# Altium PCB BV100011_UniversalSlave.PcbDoc (part 1 of 2)
Units mil, origin at the board's own origin, x right, y up, seen from the top; angles counter-clockwise.
Board outline 6690 x 4040 mil, 4 copper layers (Top Layer, Layer 1, Layer 2, Bottom Layer), stack 26.156 mil thick; 242 components, 211 nets, 882 pads, 216 vias.
Unrouted connection lines stored in the file: 81.
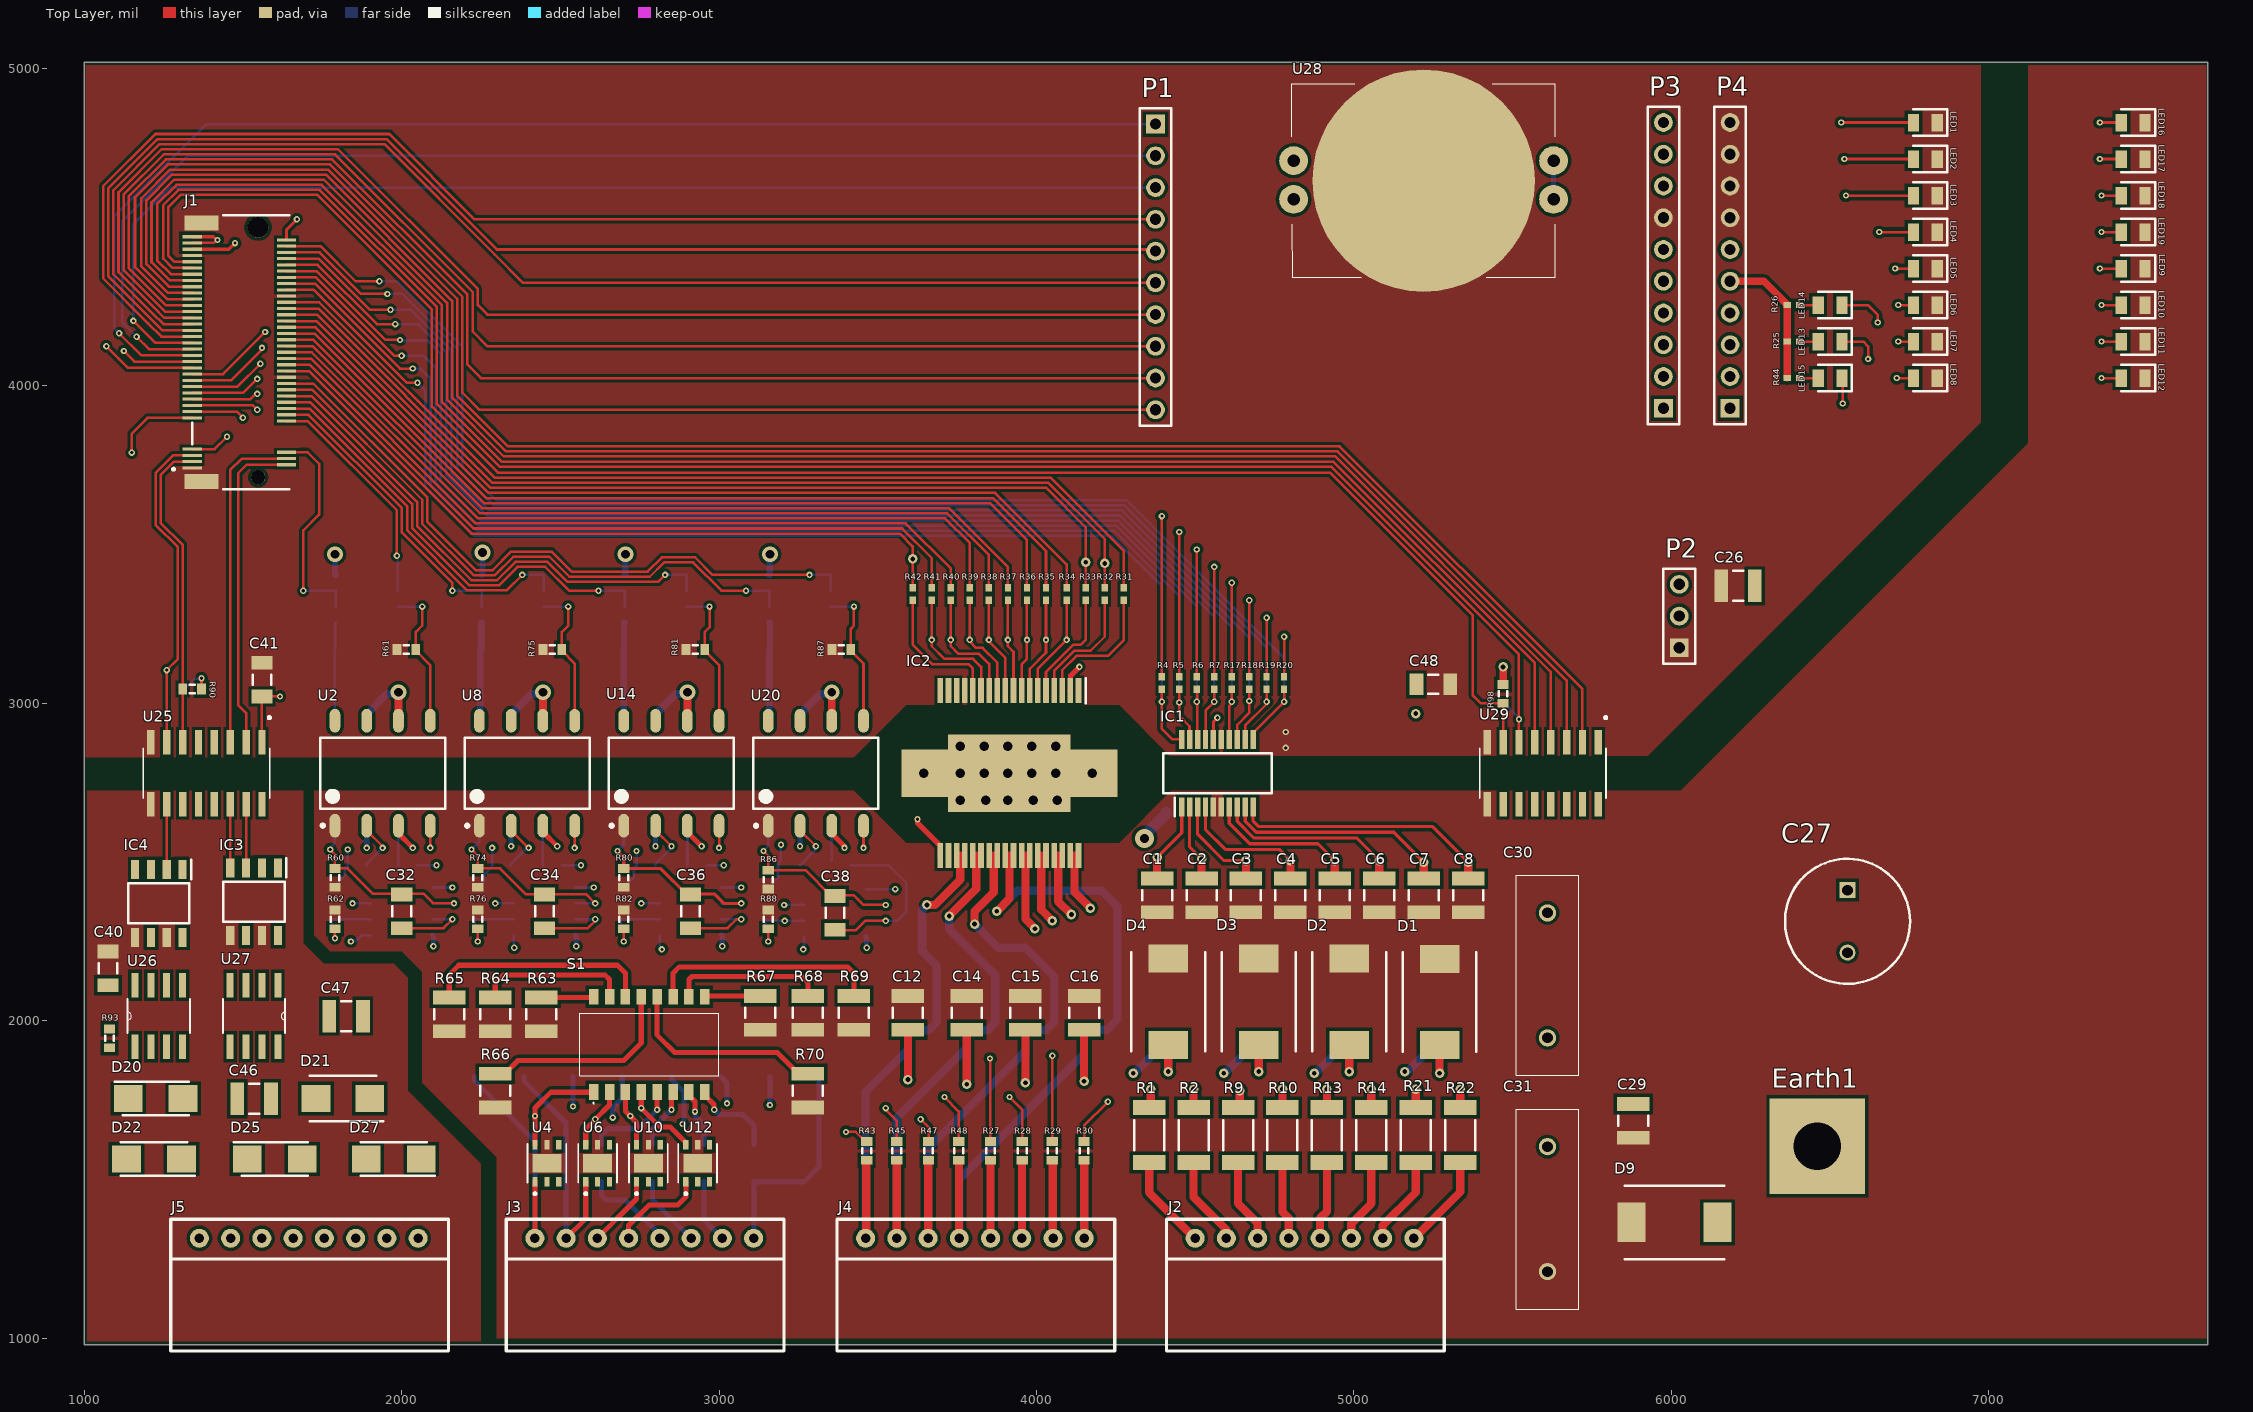
[diagram p0: Top Layer view]
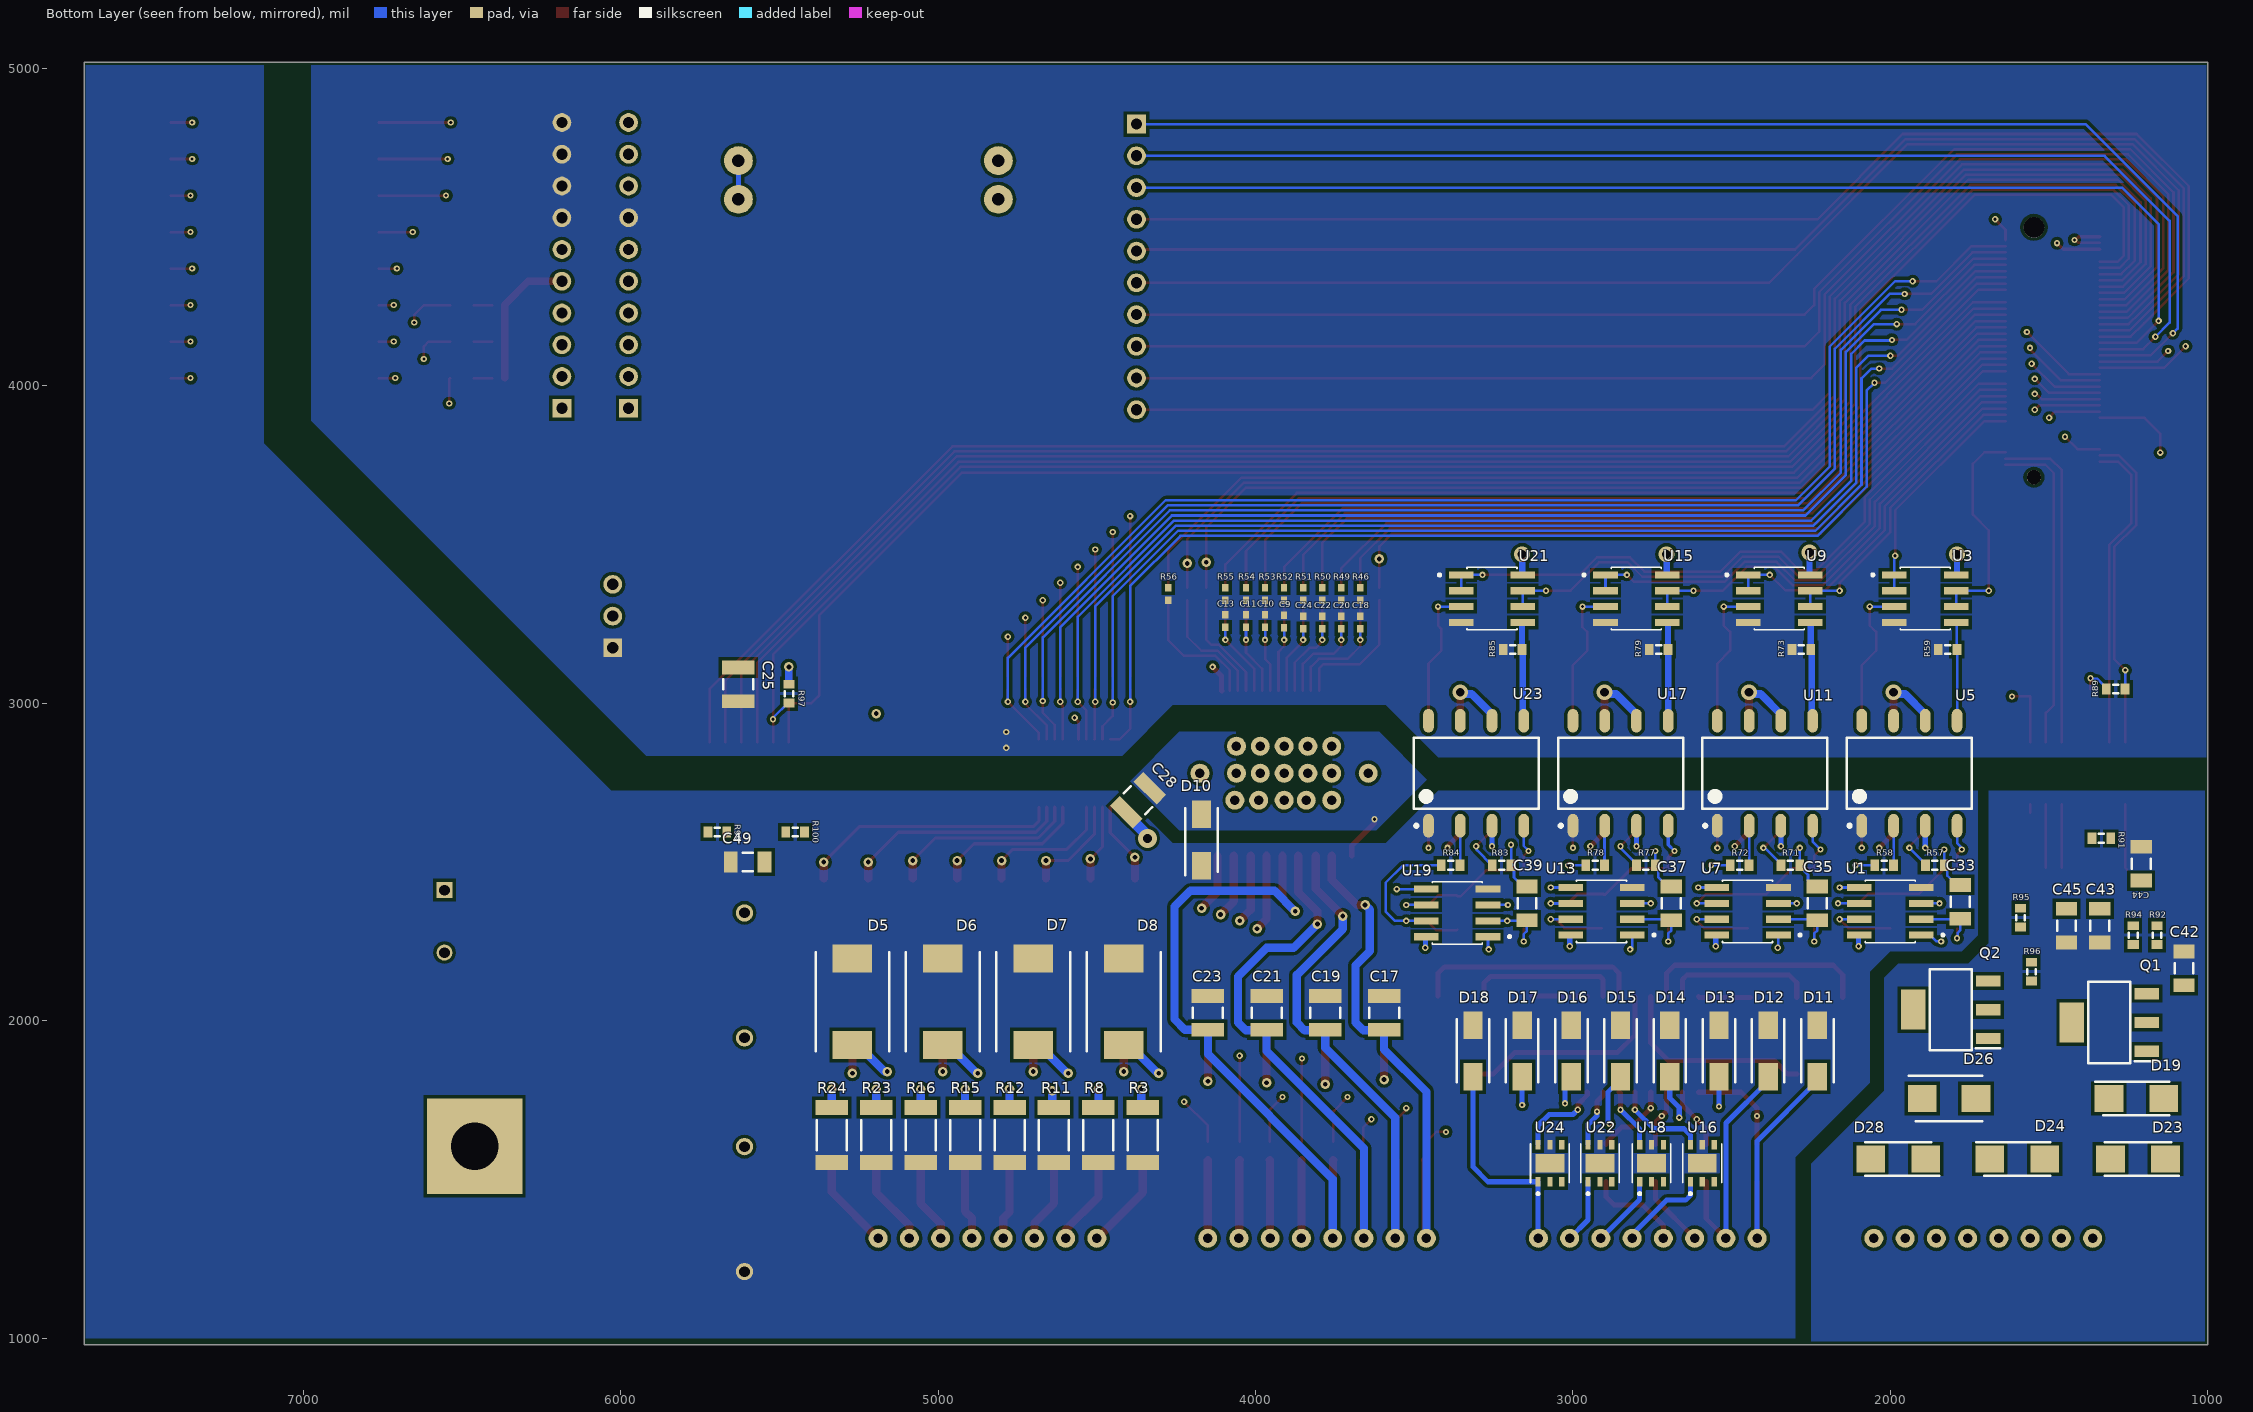
[diagram p1: Bottom Layer view, seen from below]
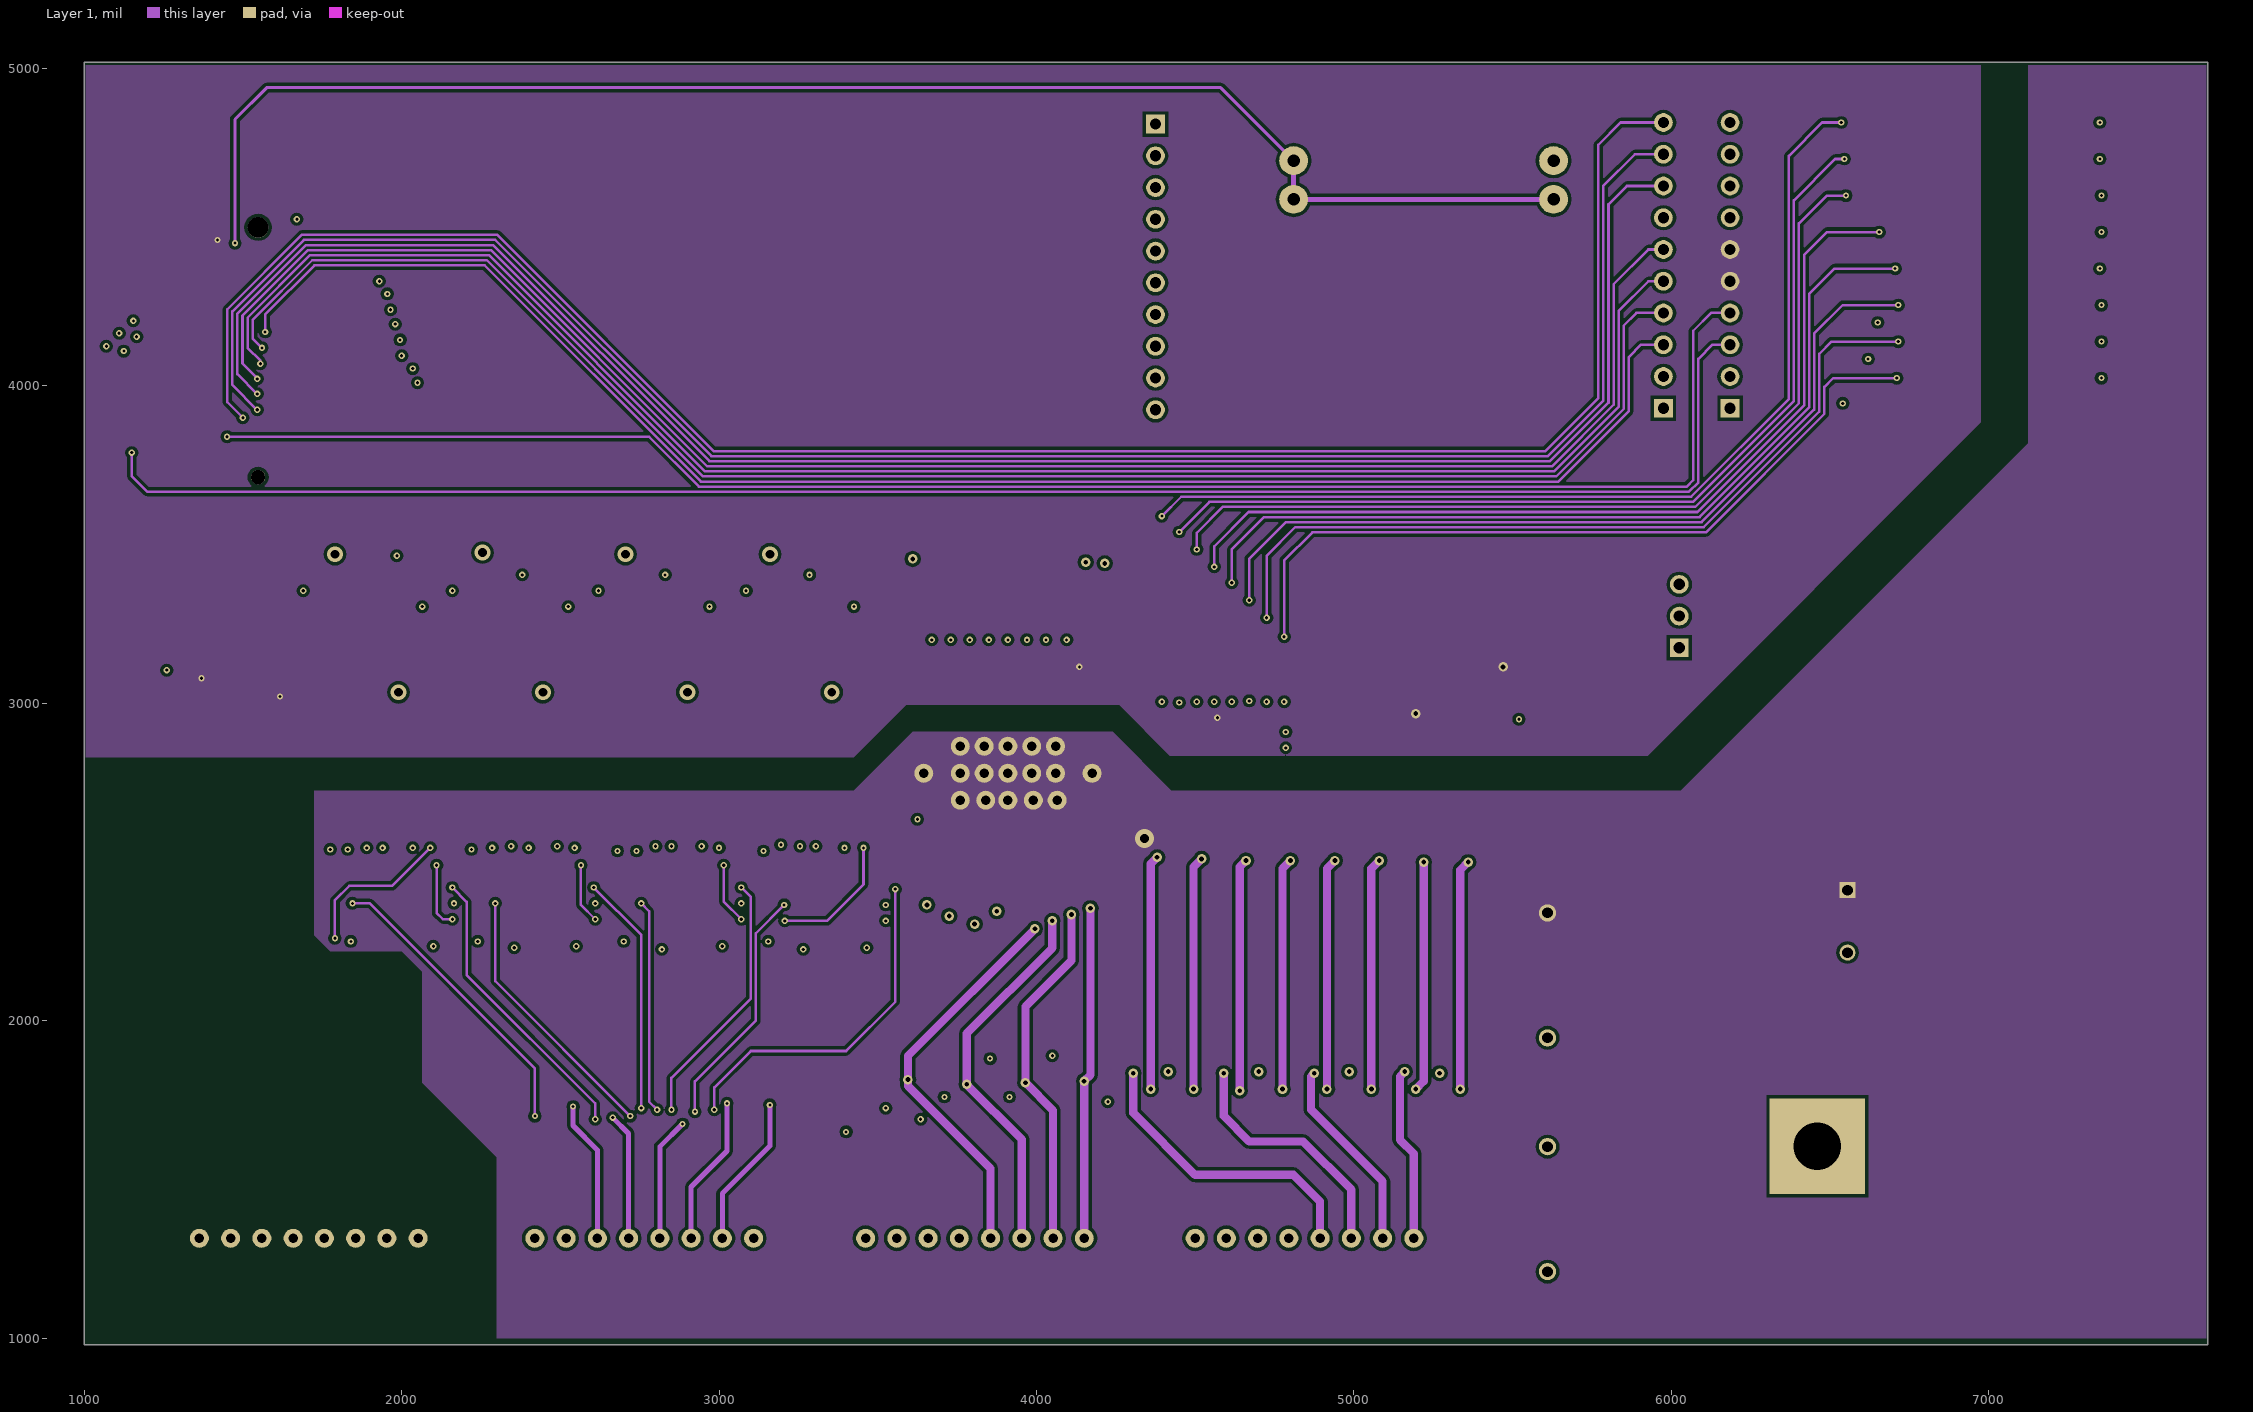
[diagram p2: Layer 1]
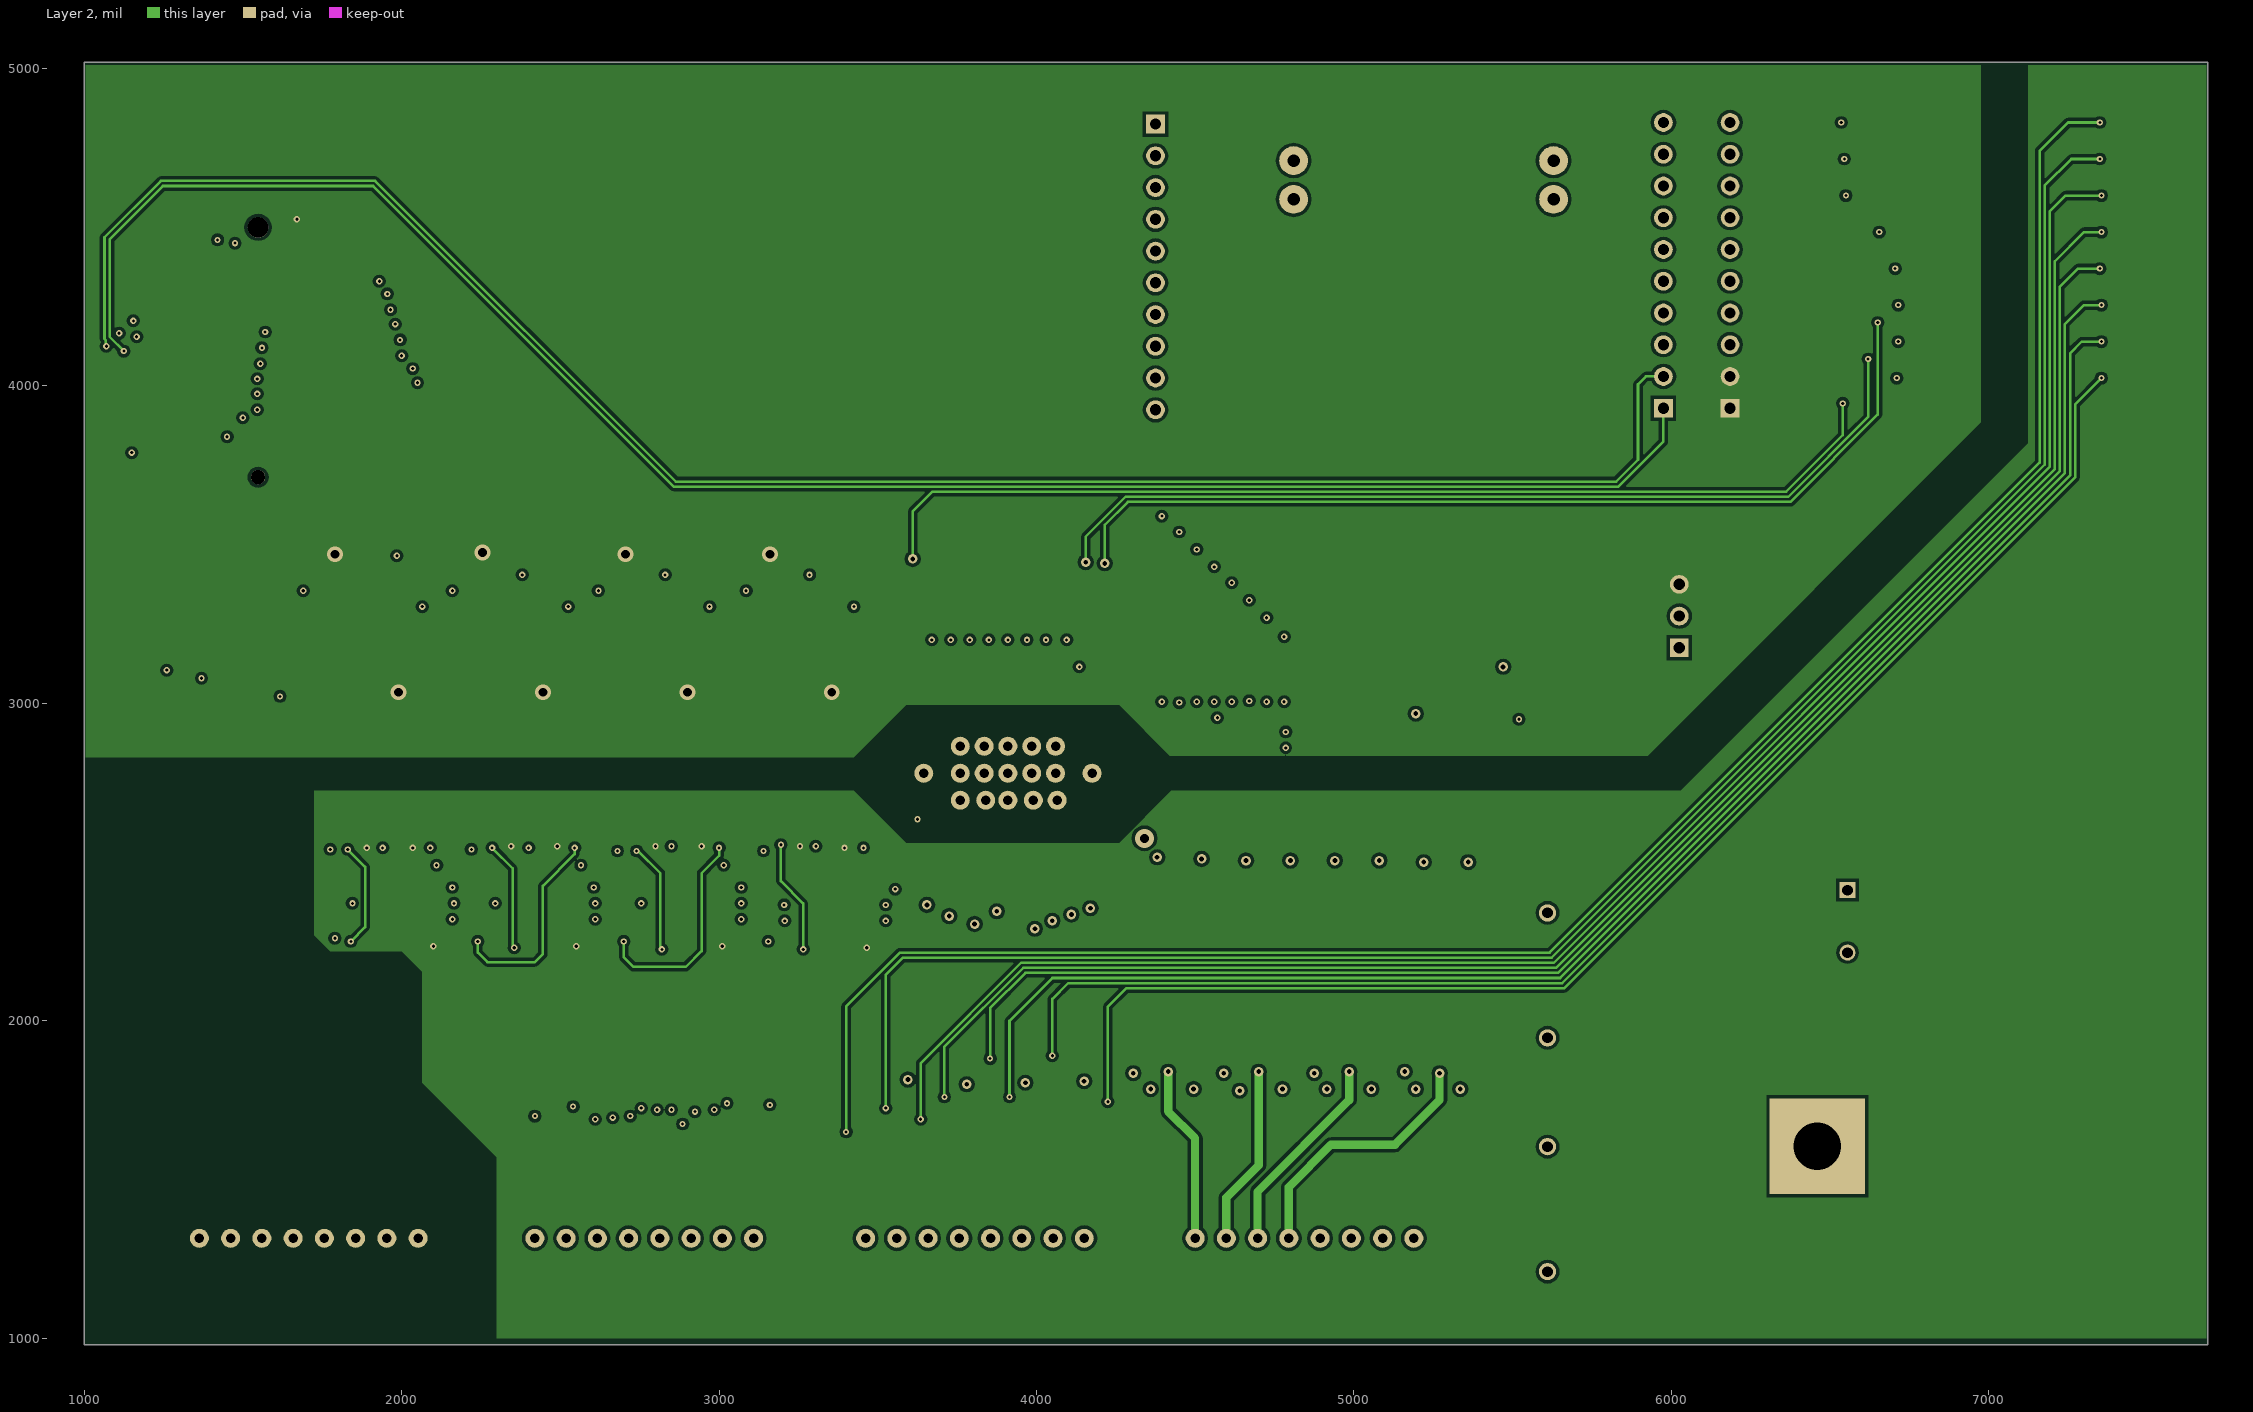
[diagram p3: Layer 2]

## Layer stack, top to bottom
Top Solder: solder mask 0.4, Solder Resist, Dk 3.5
Top Layer: signal copper 1.4
Dielectric 2: core 4, Core-009, Dk 4.5
Layer 1: signal copper 1.3778
Dielectric 1: core 12.6, FR-4, Dk 4.8
Layer 2: signal copper 1.3778
Dielectric 3: core 4, Core-009, Dk 4.5
Bottom Layer: signal copper 1.4
Bottom Solder: solder mask 0.4, Solder Resist, Dk 3.5

## Board outline
1000,980 7690,980 7690,5020 1000,5020

## Design rules (kind name [scope] priority, off if disabled: settings)
Clearance ClearencePolygon [InPolygon] p1: gap=10 ignorepadtopadclearanceinfootprint=TRUE except(0: Arc-Hole Track-Hole SMDPad-Hole THPad-Hole Via-Hole Fill-Hole Poly-Hole Region-Hole Text-Hole)
Clearance [All] p2: gap=8 ignorepadtopadclearanceinfootprint=TRUE except(0: Arc-Hole Track-Hole SMDPad-Hole THPad-Hole Via-Hole Fill-Hole Poly-Hole Region-Hole Text-Hole)
PlaneConnect [All] p1: planeconnectstyle=Direct reliefexpansion=20 reliefentries=4 reliefconductorwidth=10 reliefairgap=10
PolygonConnect [All] p1: connectstyle=Direct reliefconductorwidth=10 reliefentries=4 polygonreliefangle="90 Angle" airgapwidth=10
RoutingVias [All] p1: holewidth=10 width=20 viastyle="Through Hole" minholewidth=10 minwidth=20 maxholewidth=28 maxwidth=50
SolderMaskExpansion [All] p1: expansion=4
Width [All] p1: maxlimit=80 minlimit=4 preferedwidth=8
29 further rules are at their usual default settings.

## Classes and differential pairs
component class U_BV100011_ControlConnector: J1 J2 J3 J4 J5 P1 P2 P3 P4 U28
component class U_BV100011_ControlIsolator: C48 C49 R97 R98 R99 R100 U29
component class U_BV100011_ControlAO: C40 C41 C42 C43 C44 C45 C46 C47 D19 D20 D21 D22 D23 D24 D25 D26 D27 D28 IC3 IC4 Q1 Q2 R89 R90 R91 R92 R93 R94 R95 R96 U25 U26 U27
component class U_BV100011_ControlAI: C32 C33 C34 C35 C36 C37 C38 C39 D11 D12 D13 D14 D15 D16 D17 D18 R57 R58 R59 R60 R61 R62 R63 R64 R65 R66 R67 R68 R69 R70 R71 R72 R73 R74 R75 R76 R77 R78 R79 R80 R81 R82 R83 R84 R85 R86 R87 R88 S1 U1 U2 U3 U4 U5 U6 U7 U8 U9 U10 U11 U12 U13 U14 U15 U16 U17 U18 U19 U20 U21 U22 U23 U24
component class U_BV100011_ControlDO: C9 C10 C11 C12 C13 C14 C15 C16 C17 C18 C19 C20 C21 C22 C23 C24 C25 C26 C27 C28 C29 C30 C31 D9 D10 Earth1 IC2 LED9 LED10 LED11 LED12 LED13 LED14 LED15 LED16 LED17 LED18 LED19 R25 R26 R27 R28 R29 R30 R31 R32 R33 R34 R35 R36 R37 R38 R39 R40 R41 R42 R43 R44 R45 R46 R47 R48 R49 R50 R51 R52 R53 R54 R55 R56
component class U_BV100011_ControlDI: C1 C2 C3 C4 C5 C6 C7 C8 D1 D2 D3 D4 D5 D6 D7 D8 IC1 LED1 LED2 LED3 LED4 LED5 LED6 LED7 LED8 R1 R2 R3 R4 R5 R6 R7 R8 R9 R10 R11 R12 R13 R14 R15 R16 R17 R18 R19 R20 R21 R22 R23 R24

## Components (designator, comment, footprint, x,y, rotation, side; value= is the part's Value field where it differs from the comment)
C1 "Cap Semi" C1210 4380,2395 r270 top value=2.2nF
C2 "Cap Semi" C1210 4520,2395 r270 top value=2.2nF
C3 "Cap Semi" C1210 4660,2395 r270 top value=2.2nF
C4 "Cap Semi" C1210 4800,2395 r270 top value=2.2nF
C5 "Cap Semi" C1210 4940,2395 r270 top value=2.2nF
C6 "Cap Semi" C1210 5080,2395 r270 top value=2.2nF
C7 "Cap Semi" C1210 5220,2395 r270 top value=2.2nF
C8 "Cap Semi" C1210 5360,2395 r270 top value=2.2nF
C9 "Cap Semi" 0402 3910,3257.66 r270 bottom value=100pF
C10 "Cap Semi" 0402 3970,3260.31 r270 bottom value=100pF
C11 "Cap Semi" 0402 4030,3260 r270 bottom value=100pF
C12 "Cap Semi" C1210 3595,2025 r270 top value=22nF/50V
C13 "Cap Semi" 0402 4095,3260.32 r270 bottom value=100pF
C14 "Cap Semi" C1210 3780,2025 r270 top value=22nF/50V
C15 "Cap Semi" C1210 3965,2025 r270 top value=22nF/50V
C16 "Cap Semi" C1210 4150,2025 r270 top value=22nF/50V
C17 "Cap Semi" C1210 3595,2025 r90 bottom value=22nF/50V
C18 "Cap Semi" 0402 3670,3255 r90 bottom value=100pF
C19 "Cap Semi" C1210 3780,2025 r90 bottom value=22nF/50V
C20 "Cap Semi" 0402 3730,3255.31 r90 bottom value=100pF
C21 "Cap Semi" C1210 3965,2025 r90 bottom value=22nF/50V
C22 "Cap Semi" 0402 3790,3255 r90 bottom value=100pF
C23 "Cap Semi" C1210 4150,2025 r90 bottom value=22nF/50V
C24 "Cap Semi" 0402 3850,3255 r90 bottom value=100pF
C25 "Cap Semi" C1210 5630,3060 r90 bottom value=220nF/10V
C26 "Cap Semi" C1210 6210,3370 r0 top value=47uF/10V
C27 "EEH-AZF1H101" CAPPRD500W65D1000H1050 6555,2411.85 r270 top
C28 "Cap Semi" C1210 4370,2695 r315 bottom value=100pF
C29 "Cap Semi" C1210 5880,1685 r90 top value=100pF
C30 "4.7nF Y1 4kV" VY1472M63Y5UQ63V0 5610,1946.3 r90 top
C31 "4.7nF Y1 4kV" VY1472M63Y5UQ63V0 5610,1603.7 r270 top
C32 "Cap Semi" C1206 2000,2345 r270 top value=100pF
C33 "Cap Semi" C1206 1780,2375 r90 bottom value=100pF
C34 "Cap Semi" C1206 2450,2345 r270 top value=100pF
C35 "Cap Semi" C1206 2230,2370 r90 bottom value=100pF
C36 "Cap Semi" C1206 2910,2345 r270 top value=100pF
C37 "Cap Semi" C1206 2690,2370 r90 bottom value=100pF
C38 "Cap Semi" C1206 3365,2340 r270 top value=100pF
C39 "Cap Semi" C1206 3145,2370 r90 bottom value=100pF
C40 "Cap Semi" C1206 1075,2165 r270 top value=0.1uF
C41 "Cap Semi" C1206 1560,3075 r90 top value=0.1uF
C42 "Cap Semi" C1206 1075,2165 r270 bottom value=100nF
C43 "Cap Semi" C1206 1340,2300 r90 bottom value=100nF
C44 "Cap Semi" C1206 1210,2495 r270 bottom value=100nF
C45 "Cap Semi" C1206 1445,2300 r90 bottom value=100nF
C46 "Cap Semi" C1210 1535,1755 r0 top value=10nF
C47 "Cap Semi" C1210 1825,2015 r0 top value=10nF
C48 "Cap Semi" C1206 5250,3060 r0 top value=0.1uF
C49 "Cap Semi" C1206 5600,2500 r0 bottom value=0.1uF
D1 "SM15T33CA" DIONM8059X265N 5270,2059.17 r90 top
D2 "SM15T33CA" DIONM8059X265N 4985,2060 r90 top
D3 "SM15T33CA" DIONM8059X265N 4700,2060 r90 top
D4 "SM15T33CA" DIONM8059X265N 4415,2060 r90 top
D5 "SM15T33CA" DIONM8059X265N 5270,2060 r90 bottom
D6 "SM15T33CA" DIONM8059X265N 4985,2060 r90 bottom
D7 "SM15T33CA" DIONM8059X265N 4700,2060 r90 bottom
D8 "SM15T33CA" DIONM8059X265N 4415,2060 r90 bottom
D9 "SM15T33CA" DIONM8059X265N 6010,1365 r180 top
D10 "STPS1H100A" DIOM5126X265N 4170,2570 r90 bottom
D11 "SMAJ24CA" DIONM5026X229N 2230,1905 r270 bottom
D12 "SMAJ24CA" DIONM5026X229N 2385,1905 r270 bottom
D13 "SMAJ24CA" DIONM5026X229N 2540,1905 r270 bottom
D14 "SMAJ24CA" DIONM5026X229N 2695,1905 r270 bottom
D15 "SMAJ24CA" DIONM5026X229N 2850,1905 r270 bottom
D16 "SMAJ24CA" DIONM5026X229N 3005,1905 r270 bottom
D17 "SMAJ24CA" DIONM5026X229N 3160,1905 r270 bottom
D18 "SMAJ24CA" DIONM5026X229N 3315,1905 r270 bottom
D19 "1N4007" DIOM5327X242N 1225,1755 r180 bottom
D20 "1N4007" DIOM5327X242N 1225,1755 r0 top
D21 "SMBJ33A" DIOM5336X265N 1815,1755 r180 top
D22 "1N4007" DIOM5327X242N 1220,1565 r180 top
D23 "1N4007" DIOM5327X242N 1220,1565 r0 bottom
D24 "1N4007" DIOM5327X242N 1600,1565 r180 bottom
D25 "1N4007" DIOM5327X242N 1600,1565 r0 top
D26 "SMBJ33A" DIOM5336X265N 1815,1755 r180 bottom
D27 "1N4007" DIOM5327X242N 1975,1565 r180 top
D28 "1N4007" DIOM5327X242N 1975,1565 r0 bottom
Earth1 "" PCBComponent_1 6460,1605 r0 top
IC1 "SI8380P-IU" SOP64P600X175-20N 4570,2780.16 r90 top
IC2 "ISO8200B" SOP65P1420X360-37N 3914.84,2780.16 r270 top
IC3 "MCP4921-E_SN" SOIC127P600X175-8N 1535,2375 r270 top
IC4 "MCP4921-E_SN" SOIC127P600X175-8N 1235,2370 r270 top
J1 "2199230-8" 2199230-8 1340,4106.1 r90 top
J2 "2.5mm pitch" "2.5mm pitch" 4499.72,1315 r0 top
J3 "2.5mm pitch" "2.5mm pitch" 2419.72,1315 r0 top
J4 "2.5mm pitch" "2.5mm pitch" 3461.57,1315 r0 top
J5 "2.5mm pitch" "2.5mm pitch" 1362.87,1315 r0 top
LED1 "KP-2012SGC" LEDC2012X110N 6800,4830 r180 top
LED2 "KP-2012SGC" LEDC2012X110N 6800,4715 r180 top
LED3 "KP-2012SGC" LEDC2012X110N 6800,4600 r180 top
LED4 "KP-2012SGC" LEDC2012X110N 6800,4485 r180 top
LED5 "KP-2012SGC" LEDC2012X110N 6800,4370 r180 top
LED6 "KP-2012SGC" LEDC2012X110N 6800,4255 r180 top
LED7 "KP-2012SGC" LEDC2012X110N 6800,4140 r180 top
LED8 "KP-2012SGC" LEDC2012X110N 6800,4025 r180 top
LED9 "KP-2012SGC" LEDC2012X110N 7455,4370 r180 top
LED10 "KP-2012SGC" LEDC2012X110N 7455,4255 r180 top
LED11 "KP-2012SGC" LEDC2012X110N 7455,4140 r180 top
LED12 "KP-2012SGC" LEDC2012X110N 7455,4025 r180 top
LED13 "green" LEDC2012X110N 6500,4140 r180 top
LED14 "yellow" LEDC2012X110N 6500,4255 r180 top
LED15 "RED" LEDC2012X110N 6500,4025 r180 top
LED16 "KP-2012SGC" LEDC2012X110N 7455,4830 r180 top
LED17 "KP-2012SGC" LEDC2012X110N 7455,4715 r180 top
LED18 "KP-2012SGC" LEDC2012X110N 7455,4600 r180 top
LED19 "KP-2012SGC" LEDC2012X110N 7455,4485 r180 top
P1 "LAN" HDR1X10 4375,4825 r270 top
P2 "Header 3" HDR1X3 6025,3175 r90 top
P3 "LAN" HDR1X10 5975,3930 r90 top
P4 "LAN" HDR1X10 6185,3930 r90 top
Q1 "BCP56,115" SOT230P700X180-4N 1310,1995 r0 bottom
Q2 "BCP56,115" SOT230P700X180-4N 1810,2035 r0 bottom
R1 "Res3" 12Z-2010 4355,1640 r270 top value=1K
R2 "Res3" 12Z-2010 4495,1640 r270 top value=1K
R3 "Res3" 12Z-2010 4355,1640 r90 bottom value=1K
R4 "Res3" 0402 4395,3065 r270 top value=1K
R5 "Res3" 0402 4450,3065 r270 top value=1K
R6 "Res3" 0402 4505,3065 r270 top value=1K
R7 "Res3" 0402 4560,3065 r270 top value=1K
R8 "Res3" 12Z-2010 4495,1640 r90 bottom value=1K
R9 "Res3" 12Z-2010 4635,1640 r270 top value=1K
R10 "Res3" 12Z-2010 4775,1640 r270 top value=1K
R11 "Res3" 12Z-2010 4635,1640 r90 bottom value=1K
R12 "Res3" 12Z-2010 4775,1640 r90 bottom value=1K
R13 "Res3" 12Z-2010 4915,1640 r270 top value=1K
R14 "Res3" 12Z-2010 5055,1640 r270 top value=1K
R15 "Res3" 12Z-2010 4915,1640 r90 bottom value=1K
R16 "Res3" 12Z-2010 5055,1640 r90 bottom value=1K
R17 "Res3" 0402 4615,3065 r270 top value=1K
R18 "Res3" 0402 4670,3065 r270 top value=1K
R19 "Res3" 0402 4725,3065 r270 top value=1K
R20 "Res3" 0402 4780,3065 r270 top value=1K
R21 "Res3" 12Z-2010 5195,1640 r270 top value=1K
R22 "Res3" 12Z-2010 5335,1640 r270 top value=1K
R23 "Res3" 12Z-2010 5195,1640 r90 bottom value=1K
R24 "Res3" 12Z-2010 5335,1640 r90 bottom value=1K
R25 "Res3" 0402 6385,4140 r0 top value=680R
R26 "Res3" 0402 6385,4255 r0 top value=680R
R27 "Res3" J1-0603 3855,1590 r270 top value=6K
R28 "Res3" J1-0603 3955,1590 r270 top value=6K
R29 "Res3" J1-0603 4050,1590 r270 top value=6K
R30 "Res3" J1-0603 4150,1590 r270 top value=6K
R31 "Res3" 0402 4275,3345 r270 top value=270
R32 "Res3" 0402 4215,3345 r270 top value=270
R33 "Res3" 0402 4155,3345 r270 top value=270
R34 "Res3" 0402 4095,3345 r270 top value=270
R35 "Res3" 0402 4030,3345 r270 top value=270
R36 "Res3" 0402 3970,3345 r270 top value=270
R37 "Res3" 0402 3910,3345 r270 top value=270
R38 "Res3" 0402 3850,3345 r270 top value=270
R39 "Res3" 0402 3790,3345 r270 top value=270
R40 "Res3" 0402 3730,3345 r270 top value=270
R41 "Res3" 0402 3670,3345 r270 top value=270
R42 "Res3" 0402 3610,3345 r270 top value=0
R43 "Res3" J1-0603 3465,1590 r90 top value=6K
R44 "Res3" 0402 6385,4025 r180 top value=680R
R45 "Res3" J1-0603 3560,1590 r90 top value=6K
R46 "Res3" 0402 3670,3345 r270 bottom value=10K
R47 "Res3" J1-0603 3660,1590 r90 top value=6K
R48 "Res3" J1-0603 3755,1590 r90 top value=6K
R49 "Res3" 0402 3730,3345 r270 bottom value=10K
R50 "Res3" 0402 3790,3345 r270 bottom value=10K
R51 "Res3" 0402 3850,3345 r270 bottom value=10K
R52 "Res3" 0402 3910,3345 r270 bottom value=10K
R53 "Res3" 0402 3970,3345 r270 bottom value=10K
R54 "Res3" 0402 4030,3345 r270 bottom value=10K
R55 "Res3" 0402 4095,3345 r270 bottom value=10K
R56 "Res3" 0402 4275,3345 r270 bottom value=10K
R57 "Res3" J1-0603 1860,2490 r0 bottom value=1K
R58 "Res3" J1-0603 2020,2490 r180 bottom value=1K
R59 "Res3" J1-0603 1820,3170 r0 bottom value=1K
R60 "Res3" J1-0603 1790,2450 r270 top value=1K
R61 "Res3" J1-0603 2015,3170 r180 top value=1K
R62 "Res3" J1-0603 1790,2320 r90 top value=1K
R63 "Res3" 14-1210 2440,2020 r90 top value=120
R64 "Res3" 14-1210 2295,2020 r90 top value=120
R65 "Res3" 14-1210 2150,2020 r90 top value=120
R66 "Res3" 14-1210 2295,1780 r90 top value=120
R67 "Res3" 14-1210 3130,2025 r90 top value=120
R68 "Res3" 14-1210 3280,2025 r90 top value=120
R69 "Res3" 14-1210 3425,2025 r90 top value=120
R70 "Res3" 14-1210 3280,1780 r90 top value=120
R71 "Res3" J1-0603 2315,2490 r0 bottom value=1K
R72 "Res3" J1-0603 2475,2490 r180 bottom value=1K
R73 "Res3" J1-0603 2280,3170 r0 bottom value=1K
R74 "Res3" J1-0603 2240,2450 r270 top value=1K
R75 "Res3" J1-0603 2475,3170 r180 top value=1K
R76 "Res3" J1-0603 2240,2320 r90 top value=1K
R77 "Res3" J1-0603 2770,2490 r0 bottom value=1K
R78 "Res3" J1-0603 2930,2490 r180 bottom value=1K
R79 "Res3" J1-0603 2730,3170 r0 bottom value=1K
R80 "Res3" J1-0603 2700,2450 r270 top value=1K
R81 "Res3" J1-0603 2925,3170 r180 top value=1K
R82 "Res3" J1-0603 2700,2320 r90 top value=1K
R83 "Res3" J1-0603 3225,2490 r0 bottom value=1K
R84 "Res3" J1-0603 3385,2490 r180 bottom value=1K
R85 "Res3" J1-0603 3190,3170 r0 bottom value=1K
R86 "Res3" J1-0603 3155,2445 r270 top value=1K
R87 "Res3" J1-0603 3385,3170 r180 top value=1K
R88 "Res3" J1-0603 3155,2320 r90 top value=1K
R89 "Res3" J1-0603 1290,3045 r0 bottom value=10K
R90 "Res3" J1-0603 1340,3045 r0 top value=10K
R91 "Res3" J1-0603 1335,2575 r180 bottom value=10K
R92 "Res3" J1-0603 1160,2270 r270 bottom value=10K
R93 "Res3" J1-0603 1080,1945 r90 top value=100
R94 "Res3" J1-0603 1235,2270 r270 bottom value=20K
R95 "Res3" J1-0603 1590,2325 r90 bottom value=100
R96 "Res3" J1-0603 1555,2155 r270 bottom value=20K
R97 "Res3" J1-0603 5469.53,3030.73 r270 bottom value=10K
R98 "Res3" J1-0603 5470,3030 r270 top value=10K
R99 "Res3" J1-0603 5695,2595 r180 bottom value=10K
R100 "Res3" J1-0603 5450,2595 r180 bottom value=10K
S1 "416131160808" 416131160808 2780,1920 r0 top
U1 "LM358ADT" *SOIC127P600X175-8N#1 2000,2345 r0 bottom
U2 "LOC111P" SOP254P940X265-8N 1940,2780.16 r90 top
U3 "LM358ADT" *SOIC127P600X175-8N#1 1890,3330 r180 bottom
U4 "MAX14626ETT+" *SON95P300X300X80-7N 2457.6,1551.54 r90 top
U5 "LOC111P" SOP254P940X265-8N 1940,2780.16 r90 bottom
U6 "MAX14626ETT+" *SON95P300X300X80-7N 2617.4,1551.54 r90 top
U7 "LM358ADT" *SOIC127P600X175-8N#1 2450,2345 r0 bottom
U8 "LOC111P" SOP254P940X265-8N 2395,2780 r90 top
U9 "LM358ADT" *SOIC127P600X175-8N#1 2350,3330 r180 bottom
U10 "MAX14626ETT+" *SON95P300X300X80-7N 2777.4,1551.54 r90 top
U11 "LOC111P" SOP254P940X265-8N 2395,2780 r90 bottom
U12 "MAX14626ETT+" *SON95P300X300X80-7N 2932.6,1551.54 r90 top
U13 "LM358ADT" *SOIC127P600X175-8N#1 2910,2345 r0 bottom
U14 "LOC111P" SOP254P940X265-8N 2850,2780 r90 top
U15 "LM358ADT" *SOIC127P600X175-8N#1 2800,3330 r180 bottom
U16 "MAX14626ETT+" *SON95P300X300X80-7N 2592.4,1551.54 r90 bottom
U17 "LOC111P" SOP254P940X265-8N 2850,2780 r90 bottom
U18 "MAX14626ETT+" *SON95P300X300X80-7N 2752.4,1551.54 r90 bottom
U19 "LM358ADT" *SOIC127P600X175-8N#1 3365,2340 r0 bottom
U20 "LOC111P" SOP254P940X265-8N 3305,2780 r90 top
U21 "LM358ADT" *SOIC127P600X175-8N#1 3255,3330 r180 bottom
U22 "MAX14626ETT+" *SON95P300X300X80-7N 2915,1551.54 r90 bottom
U23 "LOC111P" SOP254P940X265-8N 3305,2780 r90 bottom
U24 "MAX14626ETT+" *SON95P300X300X80-7N 3072.6,1551.54 r90 bottom
U25 "MAX14850ASET" *SOIC127P600X175-16N 1385,2780.16 r270 top
U26 "XTR116UA" *SOIC127P600X175-8N#2 1235,2015 r90 top
U27 "XTR116UA" *SOIC127P600X175-8N#2 1535,2015 r270 top
U28 "BAT-HLD-001-THM" BATHLD001THM 5219.45,4647.01 r180 top
U29 "MAX14850ASET" *SOIC127P600X175-16N 5595,2780.16 r270 top

## Footprints (in the part's own frame and the unit in brackets; to place one, negate y for a bottom-side part, rotate by r counter-clockwise, add the part's x,y. Pads: shape width x height; smd on the part's side, far side on the other; paste and mask are expansions set on the pad)
"2.5mm pitch" [mil]
  round 60 hole 30: 1(0,0) 2(98.43,0) 3(196.85,0) 4(295.28,0) 5(393.7,0) 6(492.13,0) 7(590.55,0) 8(688.98,0)
  silkscreen extent -90,-355 785,60, body extent 365,225 365,225, height 10
12Z-2010 [mm] "Chip Resistor, Body 5.0x2.5mm, IPC High Density"
  rect 1.2x2.6 smd: 1(-2.2,0) 2(2.2,0)
  silkscreen extent -1.2,-1.2 1.2,1.2, body extent -2.58,-1.33 2.58,1.33, height 0.9
14-1210 [mm] "Chip Resistor, Body 3.2x2.5mm, IPC High Density"
  rect 1.1x2.6 smd: 1(-1.35,0) 2(1.35,0)
  silkscreen extent -0.4,-1.2 0.4,1.2, body extent -1.68,-1.32 1.68,1.32, height 0.9
0402 [mm] "Chip Capacitor, Body 1.0x0.5mm, IPC High Density"
  rect 0.6x0.5 smd: 1(-0.5,0) 2(0.5,0)
  body extent -0.55,-0.3 0.55,0.3, height 1.3
2199230-8 [mm]
  rect 0.25x1.55 smd: 1(-9.25,0) 2(-9,-7.55) 3(-8.75,0) 4(-8.5,-7.55) 5(-8.25,0) 6(-8,-7.55) 7(-7.75,0) 8(-5.5,-7.55) 9(-5.25,0) 10(-5,-7.55) 11(-4.75,0) 12(-4.5,-7.55) 13(-4.25,0) 14(-4,-7.55) 15(-3.75,0) 16(-3.5,-7.55) 17(-3.25,0) 18(-3,-7.55) 19(-2.75,0) 20(-2.5,-7.55) 21(-2.25,0) 22(-2,-7.55) 23(-1.75,0) 24(-1.5,-7.55) 25(-1.25,0) 26(-1,-7.55) 27(-0.75,0) 28(-0.5,-7.55) 29(-0.25,0) 30(0,-7.55) 31(0.25,0) 32(0.5,-7.55) 33(0.75,0) 34(1,-7.55) 35(1.25,0) 36(1.5,-7.55) 37(1.75,0) 38(2,-7.55) 39(2.25,0) 40(2.5,-7.55) 41(2.75,0) 42(3,-7.55) 43(3.25,0) 44(3.5,-7.55) 45(3.75,0) 46(4,-7.55) 47(4.25,0) 48(4.5,-7.55) 49(4.75,0) 50(5,-7.55) 51(5.25,0) 52(5.5,-7.55) 53(5.75,0) 54(6,-7.55) 55(6.25,0) 56(6.5,-7.55) 57(6.75,0) 58(7,-7.55) 59(7.25,0) 60(7.5,-7.55) 61(7.75,0) 62(8,-7.55) 63(8.25,0) 64(8.5,-7.55) 65(8.75,0) 66(9,-7.55) 67(9.25,0)
  rect 1.2x2.75 smd: 68(-10.35,-0.75) 71(10.35,-0.75)
  round 1.15 hole 1.15 unplated: 69(-10,-5.275)
  round 1.65 hole 1.65 unplated: 70(10,-5.275)
  silkscreen extent -10.95,-7.78 10.95,1.59
416131160808 [mm]
  rect 0.76x1.27 smd: 1(-4.445,-3.657) 2(-4.445,3.963) 3(-3.175,-3.657) 4(-3.175,3.963) 5(-1.905,-3.657) 6(-1.905,3.963) 7(-0.635,-3.657) 8(-0.635,3.963) 9(0.635,-3.657) 10(0.635,3.963) 11(1.905,-3.657) 12(1.905,3.963) 13(3.175,-3.657) 14(3.175,3.963) 15(4.445,-3.657) 16(4.445,3.963)
  silkscreen extent -5.57,-4.6 5.57,2.65
*SOIC127P600X175-8N#1 [mm]
  rect 1.97x0.57 smd: 1(-2.475,1.905) 2(-2.475,0.635) 3(-2.475,-0.635) 4(-2.475,-1.905) 5(2.475,-1.905) 6(2.475,-0.635) 7(2.475,0.635) 8(2.475,1.905)
  silkscreen extent -4.3,-2.5 2,2.5
*SOIC127P600X175-8N#2 [mm]
  rect 1.981x0.559 smd: 1(-2.464,1.905) 2(-2.464,0.635) 3(-2.464,-0.635) 4(-2.464,-1.905) 5(2.464,-1.905) 6(2.464,-0.635) 7(2.464,0.635) 8(2.464,1.905)
  silkscreen extent -1.37,-2.49 1.37,2.49
*SOIC127P600X175-16N [mm]
  rect 1.97x0.59 smd: 1(-2.475,4.445) 2(-2.475,3.175) 3(-2.475,1.905) 4(-2.475,0.635) 5(-2.475,-0.635) 6(-2.475,-1.905) 7(-2.475,-3.175) 8(-2.475,-4.445) 9(2.475,-4.445) 10(2.475,-3.175) 11(2.475,-1.905) 12(2.475,-0.635) 13(2.475,0.635) 14(2.475,1.905) 15(2.475,3.175) 16(2.475,4.445)
  silkscreen extent -4.54,-5.06 2,5.13
*SON95P300X300X80-7N [mm]
  rect 0.76x0.42 smd: 1(-1.485,0.95) 2(-1.485,0) 3(-1.485,-0.95) 4(1.485,-0.95) 5(1.485,0) 6(1.485,0.95)
  rect 1.5x2.3 smd: 7(0,0)
  silkscreen extent -2.54,-1.55 1.55,1.55
BATHLD001THM [mm]
  round 2.3 hole 1: 1(-10.4,1.5) 2(-10.4,-1.6) 3(10.4,-1.6) 4(10.4,1.5)
  round 17.8 smd: 5(0,0)
  silkscreen extent -10.55,-7.75 10.55,7.75
C1206 [mm] "Chip Capacitor, Body 3.2x1.6mm, IPC High Density"
  rect 1.1x1.7 smd: 1(-1.35,0) 2(1.35,0)
  silkscreen extent -0.4,-0.75 0.4,0.75, body extent -1.7,-0.9 1.7,0.9, height 1.3
C1210 [mm] "Chip Capacitor, Body 3.2x2.5mm, IPC High Density"
  rect 1.1x2.6 smd: 1(-1.35,0) 2(1.35,0)
  silkscreen extent -0.4,-1.2 0.4,1.2, body extent -1.7,-1.35 1.7,1.35, height 1.3
CAPPRD500W65D1000H1050 [mm]
  rect 1.275x1.275 hole 0.85: 1(0,0)
  round 1.275 hole 0.85: 2(5,0)
  silkscreen extent -2.5,-5 7.5,5, body extent -2.75,-5.25 7.75,5.25, height 10.5
DIOM5126X265N [mm]
  rect 2.2x1.55 smd: 1(-2.05,0) 2(2.05,0)
  silkscreen extent -2.83,-1.29 2.54,1.29, body extent -2.54,-1.29 2.54,1.29, height 2.65
DIOM5327X242N [mm]
  rect 2.3x2.15 smd: 1(-2.2,0) 2(2.2,0)
  silkscreen extent -3.27,-1.34 2.65,1.34, body extent -2.65,-1.34 2.65,1.33, height 2.42
DIOM5336X265N [mm]
  rect 2.3x2.15 smd: 1(-2.15,0) 2(2.15,0)
  silkscreen extent -3.22,-1.81 2.67,1.81, body extent -2.67,-1.81 2.67,1.81, height 2.65
DIONM5026X229N [mm]
  rect 2.2x1.55 smd: 1(-2.05,0) 2(2.05,0)
  silkscreen extent -2.52,-1.3 2.52,1.3, body extent -2.52,-1.3 2.52,1.3, height 2.29
DIONM8059X265N [mm]
  rect 2.25x3.15 smd: 1(-3.45,0) 2(3.45,0)
  silkscreen extent -3.98,-2.95 3.98,2.95, body extent -3.98,-2.95 3.98,2.95, height 2.65
HDR1X3 [mm] "Connector; Header; 3 Position"
  rect 1.5x1.5 hole 0.9: 1(0,0)
  round 1.5 hole 0.9: 2(2.54,0) 3(5.08,0)
  silkscreen extent -1.27,-1.27 6.35,1.27
HDR1X10 [mm] "Connector; Header; 10 Position"
  rect 1.5x1.5 hole 0.9: 1(0,0)
  round 1.5 hole 0.9: 2(2.54,0) 3(5.08,0) 4(7.62,0) 5(10.16,0) 6(12.7,0) 7(15.24,0) 8(17.78,0) 9(20.32,0) 10(22.86,0)
  silkscreen extent -1.27,-1.27 24.13,1.27
J1-0603 [mm] "Chip Resistor, Body 1.6x0.8mm, IPC High Density"
  rect 0.7x0.9 smd: 1(-0.75,0) 2(0.75,0)
  silkscreen extent -0.2,-0.35 0.2,0.35, body extent -0.85,-0.48 0.85,0.48, height 0.9
LEDC2012X110N [mm]
  rect 0.9x1.4 smd: 1(-0.95,0) 2(0.95,0)
  silkscreen extent -1.75,-1.05 0.95,1.05
PCBComponent_1 [mil]
  rect 300x300 hole 150: 1(0,0)
SOIC127P600X175-8N [mm]
  rect 1.525x0.65 smd: 1(-2.712,1.905) 2(-2.712,0.635) 3(-2.712,-0.635) 4(-2.712,-1.905) 5(2.712,-1.905) 6(2.712,-0.635) 7(2.712,0.635) 8(2.712,1.905)
  silkscreen extent -3.47,-2.45 1.6,2.58, body extent -3,-2.45 3,2.45, height 1.75
SOP64P600X175-20N [mm]
  rect 1.495x0.435 smd: 1(-2.702,2.858) 2(-2.702,2.222) 3(-2.702,1.588) 4(-2.702,0.952) 5(-2.702,0.318) 6(-2.702,-0.318) 7(-2.702,-0.952) 8(-2.702,-1.588) 9(-2.702,-2.222) 10(-2.702,-2.858) 11(2.702,-2.858) 12(2.702,-2.222) 13(2.702,-1.588) 14(2.702,-0.952) 15(2.702,-0.318) 16(2.702,0.318) 17(2.702,0.952) 18(2.702,1.588) 19(2.702,2.222) 20(2.702,2.858)
  silkscreen extent -3.45,-4.33 1.61,4.33, body extent -3,-4.33 3,4.33, height 1.75
SOP65P1420X360-37N [mm]
  rect 2x0.45 smd: 1(-6.6,5.525) 2(-6.6,4.875) 3(-6.6,4.225) 4(-6.6,3.575) 5(-6.6,2.925) 6(-6.6,2.275) 7(-6.6,1.625) 8(-6.6,0.975) 9(-6.6,0.325) 10(-6.6,-0.325) 11(-6.6,-0.975) 12(-6.6,-1.625) 13(-6.6,-2.275) 14(-6.6,-2.925) 15(-6.6,-3.575) 16(-6.6,-4.225) 17(-6.6,-4.875) 18(-6.6,-5.525) 19(6.6,-5.525) 20(6.6,-4.875) 21(6.6,-4.225) 22(6.6,-3.575) 23(6.6,-2.925) 24(6.6,-2.275) 25(6.6,-1.625) 26(6.6,-0.975) 27(6.6,-0.325) 28(6.6,0.325) 29(6.6,0.975) 30(6.6,1.625) 31(6.6,2.275) 32(6.6,2.925) 33(6.6,3.575) 34(6.6,4.225) 35(6.6,4.875) 36(6.6,5.525)
  rect 3.81x3.81 smd: 37(0,6.731) 37(0,-6.731)
  rect 6.2x9.8 smd: 37(0,0)
  silkscreen extent -7.6,6.1 -5.6,6.1, body extent -7.1,-7.95 7.1,7.95, height 3.6
SOP254P940X265-8N [mm] "SOP, 8-Leads, Body 9.65x6.35mm, Pitch 2.54mm, IPC Medium Density"
  oval 1.9x0.85 smd: 1(-4.2,3.81) 2(-4.2,1.27) 3(-4.2,-1.27) 4(-4.2,-3.81) 5(4.2,-3.81) 6(4.2,-1.27) 7(4.2,1.27) 8(4.2,3.81)
  silkscreen extent -4.32,-5 2.85,5, body extent -3.25,-5 3.25,5, height 2.65
SOT230P700X180-4N [mm]
  rect 1.95x0.9 smd: 1(-3,2.3) 2(-3,0) 3(-3,-2.3)
  rect 1.95x3.2 smd: 4(3,0)
  silkscreen extent -3.98,-3.25 1.68,3.25, body extent -3.5,-3.25 3.5,3.25, height 1.8
VY1472M63Y5UQ63V0 [mm]
  round 1.381 hole 0.85: 1(0,0) 2(10,0)
  silkscreen extent -3,-2.5 13,2.5, body extent -3,-2.5 13,2.5, height 19

## Part data
C1 C2 C3 C4 C5 C6 C7 C8 C9 C10 C11 C12 C13 C14 C15 C16 C17 C18 C19 C20 C21 C22 C23 C24 C25 C26 C28 C29 C32 C33 C34 C35 C36 C37 C38 C39 C40 C41 C42 C43 C44 C45 C46 C47 C48 C49: "Capacitor (Semiconductor SIM Model)", LatestRevisionDate=29-May-2009, LatestRevisionNote="IPC-7351 Footprint Added.", PackageDescription="Chip Capacitor", PackageReference=C1206, Published=8-Jun-2000, Publisher="Altium Limited"
C27: "Capacitor Polarised", Manufacturer_Name=Panasonic, Mouser Part Number=667-EEH-AZF1H101, Datasheet Link=https://componentsearchengine.com/Datasheets/1/EEH-AZF1H101.pdf, Height=10.5mm, Manufacturer_Part_Number=EEH-AZF1H101, Mouser Price/Stock=https://www.mouser.com/Search/Refine.aspx?Keyword=667-EEH-AZF1H101
C30 C31: library part VY1472M63Y5UQ63V0, "Capacitor", Manufacturer_Name="VISHAY BC COMPONENTS", Allied_Number=70122998, Allied Price/Stock=https://www.alliedelec.com/bccomponents-vishay-vy1472m63y5uq63v0/70122998/, Datasheet Link=http://www.vishay.com/docs/28537/vy1series.pdf, Height=19mm, Manufacturer_Part_Number=VY1472M63Y5UQ63V0
D1 D2 D3 D4 D5 D6 D7 D8 D9: "Diode", Manufacturer_Name=STMicroelectronics, Mouser Part Number=511-SM15T33CA, RS Part Number=9196428, Allied_Number=70390412, Allied Price/Stock=http://www.alliedelec.com/stmicroelectronics-sm15t33ca/70390412/, Datasheet Link=http://www.st.com/web/en/resource/technical/document/datasheet/CD00000724.pdf, Height=2.65mm, Manufacturer_Part_Number=SM15T33CA, Mouser Price/Stock=https://www.mouser.com/Search/Refine.aspx?Keyword=511-SM15T33CA, RS Price/Stock=https://uk.rs-online.com/web/p/products/9196428
D10: "Diode", Manufacturer_Name=STMicroelectronics, Mouser Part Number=511-STPS1H100A, RS Part Number=0249892P, Allied_Number=70014065, Allied Price/Stock=http://www.alliedelec.com/stmicroelectronics-stps1h100a/70014065/, Datasheet Link=http://www.st.com/web/en/resource/technical/document/datasheet/CD00001304.pdf, Height=2.65mm, Manufacturer_Part_Number=STPS1H100A, Mouser Price/Stock=https://www.mouser.com/Search/Refine.aspx?Keyword=511-STPS1H100A, RS Price/Stock=http://uk.rs-online.com/web/p/products/0249892P
D11 D12 D13 D14 D15 D16 D17 D18: "TVS Diode (Bi-directional)", Manufacturer_Name=LITTELFUSE, Mouser Part Number=576-SMAJ24CA, RS Part Number=1719613P, Datasheet Link=http://www.littelfuse.com/~/media/electronics/datasheets/tvs_diodes/littelfuse_tvs_diode_smaj_datasheet.pdf.pdf, Height=2.29mm, Manufacturer_Part_Number=SMAJ24CA, Mouser Price/Stock=https://www.mouser.com/Search/Refine.aspx?Keyword=576-SMAJ24CA, RS Price/Stock=http://uk.rs-online.com/web/p/products/1719613P
D19 D20 D22 D23 D24 D25 D27 D28: "Diode", Manufacturer_Name=Shikues, Datasheet Link=https://datasheet.lcsc.com/szlcsc/SK-1N4007_C126233.pdf, Height=2.42mm, Manufacturer_Part_Number=1N4007
D21 D26: "TVS Diode (Uni-directional)", Manufacturer_Name="ON Semiconductor", Mouser Part Number=512-SMBJ33A, RS Part Number=8022320P, Datasheet Link=http://www.onsemi.com/pub/Collateral/SMBJ9V0CA-D.pdf, Height=2.65mm, Manufacturer_Part_Number=SMBJ33A, Mouser Price/Stock=https://www.mouser.com/Search/Refine.aspx?Keyword=512-SMBJ33A, RS Price/Stock=http://uk.rs-online.com/web/p/products/8022320P
Earth1: library part PAD, "Earth PAD"
IC1: "Integrated Circuit", Manufacturer_Name="Silicon Labs", Mouser Part Number=634-SI8380P-IU, Datasheet Link=https://componentsearchengine.com/Datasheets/1/SI8380P-IU.pdf, Height=1.75mm, Manufacturer_Part_Number=SI8380P-IU, Mouser Price/Stock=https://www.mouser.com/Search/Refine.aspx?Keyword=634-SI8380P-IU
IC2: "Integrated Circuit", Manufacturer_Name=STMicroelectronics, Mouser Part Number=511-ISO8200B, Datasheet Link=https://componentsearchengine.com/Datasheets/1/ISO8200B.pdf, Height=3.6mm, Manufacturer_Part_Number=ISO8200B, Mouser Price/Stock=https://www.mouser.com/Search/Refine.aspx?Keyword=511-ISO8200B
IC3 IC4: "Integrated Circuit", Manufacturer_Name=Microchip, Manufacturer_Part_Number=MCP4921-E/SN, Mouser Part Number=579-MCP4921-E/SN, RS Part Number=0402803P, Allied_Number=70046155, Allied Price/Stock=http://www.alliedelec.com/microchip-technology-inc-mcp4921-e-sn/70046155/, Datasheet Link=http://ww1.microchip.com/downloads/en/DeviceDoc/22248a.pdf, Height=1.75mm, Mouser Price/Stock=https://www.mouser.com/Search/Refine.aspx?Keyword=579-MCP4921-E%2FSN, RS Price/Stock=http://uk.rs-online.com/web/p/products/0402803P
J1: "Connector", Manufacturer_Name="TE Connectivity", Mouser Part Number=571-2199230-8, Datasheet Link=http://www.farnell.com/datasheets/1795031.pdf, Manufacturer_Part_Number=2199230-8, Mouser Price/Stock=https://www.mouser.com/Search/Refine.aspx?Keyword=571-2199230-8
LED1 LED2 LED3 LED4 LED5 LED6 LED7 LED8 LED9 LED10 LED11 LED12 LED16 LED17 LED18 LED19: "LED", Manufacturer_Name=Kingbright, Mouser Part Number=N/A, RS Part Number=4663807, Datasheet Link=http://my.rs-online.com/webdocs/032f/0900766b8032fa8b.pdf, Height=1.1mm, Manufacturer_Part_Number=KP-2012SGC, Mouser Price/Stock=https://www.mouser.com/Search/Refine.aspx?Keyword=N%2FA, RS Price/Stock=https://uk.rs-online.com/web/p/products/4663807
LED13 LED14 LED15: library part KP-2012SGC, "LED", Manufacturer_Name=Kingbright, Mouser Part Number=N/A, RS Part Number=4663807, Datasheet Link=http://my.rs-online.com/webdocs/032f/0900766b8032fa8b.pdf, Height=1.1mm, Manufacturer_Part_Number=KP-2012SGC, Mouser Price/Stock=https://www.mouser.com/Search/Refine.aspx?Keyword=N%2FA, RS Price/Stock=https://uk.rs-online.com/web/p/products/4663807
P1 P3 P4: library part "Header 10", "Header, 10-Pin", LatestRevisionDate=17-Jul-2002, LatestRevisionNote="Re-released for DXP Platform.", Publisher="Altium Limited"
P2: "Header, 3-Pin", LatestRevisionDate=17-Jul-2002, LatestRevisionNote="Re-released for DXP Platform.", Publisher="Altium Limited"
Q1 Q2: "Transistor BJT NPN", Manufacturer_Name=Nexperia, Mouser Part Number=771-BCP56-T/R, RS Part Number=1125453P, Datasheet Link=https://assets.nexperia.com/documents/data-sheet/BCP56_BCX56_BC56PA.pdf, Height=1.8mm, Manufacturer_Part_Number=BCP56,115, Mouser Price/Stock=https://www.mouser.com/Search/Refine.aspx?Keyword=771-BCP56-T%2FR, RS Price/Stock=http://uk.rs-online.com/web/p/products/1125453P
R1 R2 R3 R4 R5 R6 R7 R8 R9 R10 R11 R12 R13 R14 R15 R16 R17 R18 R19 R20 R21 R22 R23 R24 R25 R26 R27 R28 R29 R30 R31 R32 R33 R34 R35 R36 R37 R38 R39 R40 R41 R42 R43 R44 R45 R46 R47 R48 R49 R50 R51 R52 R53 R54 R55 R56 R57 R58 R59 R60 R61 R62 R63 R64 R65 R66 R67 R68 R69 R70 R71 R72 R73 R74 R75 R76 R77 R78 R79 R80 R81 R82 R83 R84 R85 R86 R87 R88 R89 R90 R91 R92 R93 R94 R95 R96 R97 R98 R99 R100: "Resistor", LatestRevisionDate=29-May-2009, LatestRevisionNote="IPC-7351 Footprint Added.", PackageDescription="Chip Resistor", PackageReference=J1-0603, Published=8-Jun-2000, Publisher="Altium Limited"
S1: "Switch", Manufacturer_Name="Wurth Elektronik", Mouser Part Number=710-416131160808, RS Part Number=7856119, Datasheet Link=https://katalog.we-online.com/em/datasheet/4161311608xx.pdf, Height=2mm, Manufacturer_Part_Number=416131160808, Mouser Price/Stock=https://www.mouser.com/Search/Refine.aspx?Keyword=710-416131160808, RS Price/Stock=http://uk.rs-online.com/web/p/products/7856119
U1 U3 U7 U9 U13 U15 U19 U21: "LM358 Series 30 V 1.1 MHz Low Power Dual Operational Amplifier - SOIC-8", Package="SOIC-8 STMicroelectronics", Availability=Unavailable, MF=STMicroelectronics, MP=LM358ADT, Price=None, SnapEDA_Link=https://www.snapeda.com/parts/LM358ADT/STMicroelectronics/view-part/?ref=snap
U2 U5 U8 U11 U14 U17 U20 U23: "Linear Optocoupler"
U4 U6 U10 U12 U16 U18 U22 U24: "Circuit Protection Misc Current Loop Protector", Package="TDFN-6 Maxim", Availability=Unavailable, MF="Maxim Integrated", MP=MAX14626ETT+, Price=None, SnapEDA_Link=https://www.snapeda.com/parts/MAX14626ETT%2B/Maxim%20Integrated/view-part/?ref=snap
U25 U29: "Digital Isolator, 6-Ch, 30ns, Nsoic-16", Package="SOIC-16 Maxim", Availability=Unavailable, MF="Maxim Integrated", MP=MAX14850ASE+, Price=None, SnapEDA_Link=https://www.snapeda.com/parts/MAX14850ASE%2B/Maxim%20Integrated/view-part/?ref=snap
U26 U27: "Sensors, Sensor Conditioning, 4-20mA Transmitters 4-20mA Current Loop Transmitters", Package="SOIC-8 Texas Instruments", Availability=Unavailable, MF="Texas Instruments", MP=XTR116UA, Price=None, SnapEDA_Link=https://www.snapeda.com/parts/XTR116UA/Texas%20Instruments/view-part/?ref=snap
U28: "Undefined or Miscellaneous", Manufacturer_Name="Linx Technologies", Mouser Part Number=712-BAT-HLD-001-THM, Datasheet Link="http://www.mouser.com/datasheet/2/238/BAT-HLD-001-THM Diagram-1175214.pdf", Height=4.2mm, Manufacturer_Part_Number=BAT-HLD-001-THM, Mouser Price/Stock=https://www.mouser.com/Search/Refine.aspx?Keyword=712-BAT-HLD-001-THM

## Free pads (board coordinates)
  round 60 hole 30: 2(3760,2865) 3(3835,2865) 4(3910,2865) 5(3985,2865) 6(4060,2865) 7(3760,2780) 8(3835,2780) 9(3910,2780) 10(3985,2780) 11(4060,2780) 12(3760,2695) 13(3840,2695) 14(3910,2695) 15(3990,2695) 16(4065,2695) 17(4175,2780) 18(3645,2780)

## Via types
v1: diameter 20, hole 10, Top Layer to Bottom Layer, 166 vias
v2: diameter 30, hole 15, Top Layer to Bottom Layer, 41 vias
v3: diameter 50, hole 28, Top Layer to Bottom Layer, 8 vias
v4: diameter 60, hole 28, Top Layer to Bottom Layer, 1 vias

## Nets (pads, with @x,y where several pads share a name; then routed paths per layer and width w, separated by ;. In a path a pad name is that pad's centre, name@x,y a point inside that pad or via, vN(x,y) a via of type N, cw(c..) or ccw(c..) an arc to the next point about the centre after c; other vN are vias at no path point)
+3.3V: C49.1 R99.1 R100.1 U29.16
+3.3V_ISO: C25.2 C26.2 C41.1 C48.1 IC1.16 IC2.2 J1.65 J1.67 P4.5 P4.6 R25.1 R26.1 R44.2 R89.2 R90.2 R97.1 R98.1 U25.1 U29.1 | length 1177.9
  Top Layer w8: J1.65@1340,4450.59 1407.79,4450.59 1417.2,4460 v1@1417.29,4460 ; R90.2@1369.53,3045 v1(1369.53,3079.53) ; U25.1@1560,2877.6 C41.1@1560,3021.85 v1(1616.85,3021.85)
  Top Layer w10: J1.67@1340,4470.28 1407.02,4470.28 v1@1417.29,4460 ; IC1.16@4557.48,2886.54 4557.48,2942.48 v1(4570,2955)
  Top Layer w17: IC2.2@4106.77,3040 4107,3040.23 4107,3087 v1(4135,3115)
  Top Layer w23: R98.1@5470,3059.53 v2(5470,3115) ; P4.5@6185,4330 6291.66,4330 6365.31,4256.35 R26.1@6365.31,4255 R25.1@6365.31,4140 R44.2@6365.31,4025
  Bottom Layer w8: R89.2@1319.53,3045 1319.53,3048.94 1347.82,3077.23 1367.23,3077.23 v1(1369.53,3079.53)
  Bottom Layer w23: R97.1@5469.53,3060.25 5470,3060.73 v2(5470,3115)
  other v1: 1420,4460
  other v2: 5195,2967.87
+5V: U1.8 U2.3 U5.3 U7.8 U8.3 U11.3 U13.8 U14.3 U17.3 U19.8 U20.3 U23.3 | length 749.2
  Top Layer w16: U2.3@1990,2614.8 1990,2590 v1(2035,2545) ; U8.3@2445,2614.65 2445,2595 v1(2490,2550) ; U14.3@2900,2614.65 2900,2595 v1(2945,2550) ; U20.3@3355,2614.65 3355,2590 3395,2550 v1(3395,2545)
  Bottom Layer w16: v1(1890,2545) U5.3@1890,2614.8 ; U1.8@2097.44,2270 2100,2267.44 v1(2100,2235) ; v1(2345,2550) U11.3@2345,2614.65 ; U7.8@2547.44,2270 2550,2267.44 v1(2550,2235) ; v1(2800,2550) U17.3@2800,2614.65 ; U13.8@3007.44,2270 3010,2267.44 v1(3010,2235) ; v1(3255,2550) U23.3@3255,2614.65 ; U19.8@3462.44,2265 3465,2262.44 v1(3465,2230)
+5V_ISO: J1.66 P2.3 P4.1 P4.2 U2.6 U3.8 U5.6 U8.6 U9.8 U11.6 U14.6 U15.8 U17.6 U20.6 U21.8 U23.6 | length 1312.7
  Top Layer w9: J1.66@1637.24,4460.43 1637.24,4492.24 v1(1670,4525)
  Top Layer w25: U2.6@1990,2945.51 v3(1990,3035) ; U8.6@2445,2945.35 v3(2445,3035) ; U14.6@2900,2945.35 v3(2900,3035) ; U20.6@3355,2945.35 v3(3355,3035)
  Bottom Layer w20: U3.8@1792.56,3405 1791.22,3405 1790,3406.22 v3(1790,3470) v3@1792.56,3467.44 ; U9.8@2252.56,3405 2253.78,3405 2255,3406.22 v3(2255,3475) ; v3@2700,3460 v3@2702.56,3457.44 ; U15.8@2702.56,3405 2703.78,3405 2705,3406.22 v3(2705,3470) ; U21.8@3157.56,3405 3158.78,3405 3160,3406.22 v3(3160,3470)
  Bottom Layer w25: U5.6@1890,2945.51 1890,2966.18 1954.03,3030.22 1985.22,3030.22 v3(1990,3035) ; U11.6@2345,2945.35 2345,2966.02 2409.19,3030.22 2440.22,3030.22 v3(2445,3035) ; U17.6@2800,2945.35 2800,2966.02 2864.19,3030.22 2895.22,3030.22 v3(2900,3035) ; U23.6@3255,2945.35 3255,2966.02 3319.19,3030.22 3350.22,3030.22 v3(3355,3035)
AI0: D11.2 J3.1 U4.1 | length 766.1
  Top Layer w16: J3.1@2419.72,1315 2419.96,1315.24 2419.96,1492.83 U4.1@2420.2,1493.07
  Bottom Layer w16: D11.2@2230,1824.29 2230,1811.5 2419.72,1621.77 J3.1@2419.72,1315
AI1: D12.2 J3.2 U6.1 | length 768.1
  Top Layer w16: J3.2@2518.15,1315 2580,1376.85 U6.1@2580,1493.07
  Bottom Layer w16: D12.2@2385,1824.29 2385,1811.5 2518.15,1678.35 J3.2@2518.15,1315
AI2: D13.2 J3.3 U10.1 | length 770.2
  Top Layer w16: J3.3@2616.57,1315 2740,1438.43 U10.1@2740,1493.07
  Layer 1 w16: v1(2540,1730) 2540,1670 2616.57,1593.43 J3.3@2616.57,1315
  Bottom Layer w16: v1(2540,1730) D13.2@2540,1824.29
AI3: D14.2 J3.4 U12.1 | length 847.9
  Top Layer w16: J3.4@2715,1315 2715,1355 2780,1420 2870,1420 2895.2,1445.2 U12.1@2895.2,1493.07
  Layer 1 w16: v1(2665,1695) 2715,1645 J3.4@2715,1315
  Bottom Layer w16: v1(2665,1695) 2665,1726.98 2695,1756.98 D14.2@2695,1824.29
AI4: D15.2 J3.5 U16.1 | length 846.9
  Layer 1 w16: J3.5@2813.43,1315 2813.43,1603.43 v1(2885,1675)
  Bottom Layer w16: U16.1@2629.8,1493.07 2629.8,1450.2 2645,1435 2705,1435 2813.43,1326.57 J3.5@2813.43,1315 ; D15.2@2850,1824.29 2850,1815 2890,1775 2890,1680 v1(2885,1675)
AI5: D16.2 J3.6 U18.1 | length 793.1
  Layer 1 w16: J3.6@2911.85,1315 2911.85,1476.88 3025,1590.03 v1(3025,1740)
  Bottom Layer w16: U18.1@2789.8,1493.07 2789.8,1437.05 J3.6@2911.85,1315 ; D16.2@3005,1824.29 3025,1804.29 v1(3025,1740)
AI6: D17.2 J3.7 U22.1 | length 775.1
  Layer 1 w16: J3.7@3010.28,1315 3010.28,1456.09 3160,1605.82 v1(3160,1735)
  Bottom Layer w16: U22.1@2952.67,1494.67 2952.4,1494.4 U22.1@2952.4,1493.07 2952.4,1372.87 J3.7@3010.28,1315 ; v1(3160,1735) D17.2@3160,1824.29
AI7: D18.2 J3.8 U24.1 | length 687.3
  Bottom Layer w16: J3.8@3108.7,1315 3109.73,1316.03 3109.73,1492.8 U24.1@3110,1493.07 3268.07,1493.07 3315,1540 D18.2@3315,1824.29
DI0: D4.1 J2.1 R1.2 | length 942.6
  Top Layer w26: R1.2@4355,1553.39 4355,1459.72 J2.1@4499.72,1315 ; v2(4415,1840) D4.1@4415,1924.17
  Layer 2 w26: v2(4415,1840) 4415,1715 4499.72,1630.28 J2.1@4499.72,1315
DI1: D3.1 J2.2 R2.2 | length 932.5
  Top Layer w26: R2.2@4495,1553.39 4495,1445 4598.15,1341.85 J2.2@4598.15,1315 ; v2(4700,1840) D3.1@4700,1924.17
  Layer 2 w26: J2.2@4598.15,1315 4598.15,1443.15 4700,1545 v2(4700,1840)
DI2: D2.1 J2.3 R9.2 | length 992.5
  Top Layer w26: R9.2@4635,1553.39 4635,1425 4696.57,1363.43 J2.3@4696.57,1315 ; v2(4985,1840) D2.1@4985,1924.17
  Layer 2 w26: J2.3@4696.57,1315 4696.57,1461.57 4985,1750 v2(4985,1840)
DI3: D1.1 J2.4 R10.2 | length 1170
  Top Layer w26: R10.2@4775,1553.39 4775,1397.91 4795,1377.91 J2.4@4795,1315 ; v2(5270,1835) D1.1@5270,1923.35
  Layer 2 w26: J2.4@4795,1315 4795,1476.92 4928.08,1610 5130,1610 5270,1750 v2(5270,1835)
DI4: D8.1 J2.5 R13.2 | length 1339.6
  Top Layer w26: J2.5@4893.43,1315 4893.43,1378.43 4915,1400 R13.2@4915,1553.39
  Layer 1 w26: v2(4305,1835) 4305,1710 4500,1515 4810,1515 4893.43,1431.57 J2.5@4893.43,1315
  Bottom Layer w26: v2(4305,1835) 4308.11,1835 D8.1@4397.28,1924.17
  Bottom Layer w32: D8.1@4397.28,1924.17 D8.1@4415,1924.17
DI5: D7.1 J2.6 R14.2 | length 1197.5
  Top Layer w26: J2.6@4991.85,1315 4991.85,1361.85 5055,1425 R14.2@5055,1553.39
  Layer 1 w26: v2(4590,1835) 4590,1700 4670,1620 4840,1620 4991.85,1468.15 J2.6@4991.85,1315
  Bottom Layer w26: v2(4590,1835) 4590.77,1835.77 4593.88,1835.77 4682.28,1924.17 D7.1@4700,1924.17
DI6: D6.1 J2.7 R21.2 | length 1046.2
  Top Layer w26: J2.7@5090.28,1315 5090.28,1355.28 5195,1460 R21.2@5195,1553.39
  Layer 1 w26: v2(4875,1835) 4865,1825 4865,1720 5090.28,1494.72 J2.7@5090.28,1315
  Bottom Layer w26: v2(4875,1835) 4875.77,1835.77 4878.88,1835.77 4967.28,1924.17 D6.1@4985,1924.17
DI7: D5.1 J2.8 R22.2 | length 993.2
  Top Layer w26: J2.8@5188.7,1315 5335,1461.3 R22.2@5335,1553.39
  Layer 1 w26: v2(5160,1840) 5145,1825 5145,1625 5188.7,1581.3 J2.8@5188.7,1315
  Bottom Layer w26: v2(5160,1840) 5160.77,1840.77 5168.88,1840.77 5252.28,1924.17 D5.1@5270,1924.17
DI_IN0: C1.1 IC1.1 R1.1 R3.2 | length 1116.9
  Top Layer w10: v2(4380,2515) 4457.48,2592.48 IC1.1@4457.48,2673.78
  Top Layer w26: R1.1@4355,1726.61 4360,1731.61 v2(4360,1785) ; C1.1@4380,2448.15 v2(4380,2515)
  Layer 1 w26: v2(4360,1785) 4360,2495 v2(4380,2515)
  Bottom Layer w26: R3.2@4355,1726.61 4360,1731.61 v2(4360,1785)
DI_IN1: C2.1 IC1.2 R2.1 R8.2 | length 1093.3
  Top Layer w10: IC1.2@4482.52,2673.78 4482.52,2547.48 v2(4520,2510)
  Top Layer w26: R2.1@4495,1726.61 v2(4495,1785) ; C2.1@4520,2448.15 v2(4520,2510)
  Layer 1 w26: v2(4495,1785) 4495,2485 v2(4520,2510)
  Bottom Layer w26: R8.2@4495,1726.61 v2(4495,1785)
DI_IN2: C3.1 IC1.3 R9.1 R11.2 | length 1174
  Top Layer w10: IC1.3@4507.48,2673.78 4507.48,2587.52 4590,2505 v2(4660,2505)
  Top Layer w26: R9.1@4635,1726.61 4640,1731.61 v2(4640,1780) ; C3.1@4660,2448.15 v2(4660,2505)
  Layer 1 w26: v2(4640,1780) 4640,2485 v2(4660,2505)
  Bottom Layer w26: R11.2@4635,1726.61 4640,1731.61 v2(4640,1780)
DI_IN3: C4.1 IC1.4 R10.1 R12.2 | length 1283.1
  Top Layer w10: IC1.4@4532.52,2673.78 4532.52,2602.48 4595,2540 4765,2540 v2(4800,2505)
  Top Layer w26: R10.1@4775,1726.61 v2(4775,1785) ; C4.1@4800,2448.15 v2(4800,2505)
  Layer 1 w26: v2(4775,1785) 4775,2480 v2(4800,2505)
  Bottom Layer w26: R12.2@4775,1726.61 v2(4775,1785)
DI_IN4: C5.1 IC1.7 R13.1 R15.2 | length 1336.4
  Top Layer w10: IC1.7@4607.48,2673.78 4607.48,2622.52 4672,2558 4887,2558 v2(4940,2505)
  Top Layer w26: R13.1@4915,1726.61 v2(4915,1785) ; C5.1@4940,2448.15 v2(4940,2505)
  Layer 1 w26: v2(4915,1785) 4915,2480 v2(4940,2505)
  Bottom Layer w26: R15.2@4915,1726.61 v2(4915,1785)
DI_IN5: C6.1 IC1.8 R14.1 R16.2 | length 1448.1
  Top Layer w10: IC1.8@4632.52,2673.78 4632.52,2628.22 4684.74,2576 5009,2576 v2(5080,2505)
  Top Layer w26: R14.1@5055,1726.61 v2(5055,1785) ; C6.1@5080,2448.15 v2(5080,2505)
  Layer 1 w26: v2(5055,1785) 5055,2480 v2(5080,2505)
  Bottom Layer w26: R16.2@5055,1726.61 v2(5055,1785)
DI_IN6: C7.1 IC1.9 R21.1 R23.2 | length 1554.9
  Top Layer w10: IC1.9@4657.48,2673.78 4657.48,2628.72 4692.2,2594 5126,2594 v2(5220,2500)
  Top Layer w26: R21.1@5195,1726.61 v2(5195,1785) ; C7.1@5220,2448.15 v2(5220,2500)
  Layer 1 w26: v2(5195,1785) 5220,1810 v2(5220,2500)
  Bottom Layer w26: R23.2@5195,1726.61 v2(5195,1785)
DI_IN7: C8.1 IC1.10 R22.1 R24.2 | length 1669.6
  Top Layer w10: IC1.10@4682.52,2673.78 4682.52,2629.13 4699.65,2612 5248,2612 v2(5360,2500)
  Top Layer w26: R22.1@5335,1726.61 v2(5335,1785) ; C8.1@5360,2448.15 v2(5360,2500)
  Layer 1 w26: v2(5335,1785) 5335,2475 v2(5360,2500)
  Bottom Layer w26: R24.2@5335,1726.61 v2(5335,1785)
DSW_AI0: S1.1 U1.3 U4.6 | length 1319
  Top Layer w16: U4.6@2420.2,1610 2420.2,1725.2 2470,1775 2603.98,1775 S1.1@2605,1776.02
  Layer 1 w8: v1(1845,2370) 1900,2370 2420,1850 v1(2420,1700)
  Bottom Layer w8: v1(1845,2370) U1.3@1902.56,2370
DSW_AI1: S1.3 U1.5 U6.6 | length 1176
  Top Layer w16: U6.6@2580,1610 2580,1660 v1(2610,1690) 2655,1735 S1.3@2655,1776.02
  Layer 1 w8: v1(2160,2420) 2205,2375 2205,2145 2610,1740 v1(2610,1690)
  Bottom Layer w8: U1.5@2097.44,2420 v1(2160,2420)
DSW_AI2: S1.5 U7.3 U10.6 | length 1084.1
  Top Layer w16: S1.5@2705,1776.02 2705,1715 v1(2720,1700) 2740,1680 U10.6@2740,1610
  Layer 1 w8: v1(2295,2370) 2295,2125 v1(2720,1700)
  Bottom Layer w8: v1(2295,2370) U7.3@2352.56,2370
DSW_AI3: S1.7 U7.5 U12.6 | length 1057.5
  Top Layer w16: S1.7@2755,1776.02 v1(2755,1725) 2815,1665 2846.89,1665 2895.2,1616.69 U12.6@2895.2,1610
  Layer 1 w8: v1(2605,2420) 2755,2270 v1(2755,1725)
  Bottom Layer w8: U7.5@2547.44,2420 v1(2605,2420)
DSW_AI4: S1.9 U13.3 U16.6 | length 1022.5
  Top Layer w16: v1(2805,1720) S1.9@2805,1776.02
  Layer 1 w8: v1(2755,2370) 2780,2345 2780,1745 v1(2805,1720)
  Bottom Layer w8: v1(2755,2370) U13.3@2812.56,2370
  Bottom Layer w16: U16.6@2629.8,1610 2629.8,1639.8 2650,1660 2745,1660 v1(2805,1720)
DSW_AI5: S1.11 U13.5 U18.6 | length 1071.6
  Top Layer w16: v1(2850,1720) 2850.77,1720.77 2850.77,1771.79 S1.11@2855,1776.02
  Layer 1 w8: v1(2850,1720) 2850,1820 3100,2070 3100,2390 v1(3070,2420)
  Bottom Layer w8: U13.5@3007.44,2420 v1(3070,2420)
  Bottom Layer w16: U18.6@2789.8,1610 2789.8,1659.8 v1(2850,1720)
DSW_AI6: S1.13 U19.3 U22.6 | length 1015.6
  Top Layer w16: S1.13@2905,1776.02 2905,1765 2924.01,1745.99 v1(2924.01,1713.97)
  Layer 1 w8: v1(2924.01,1713.97) 2924.01,1809.01 3116,2001 3116,2276 v1(3205,2365)
  Bottom Layer w8: v1(3205,2365) U19.3@3267.56,2365
  Bottom Layer w16: v1(2924.01,1713.97) 2924.01,1700.99 2952.4,1672.6 U22.6@2952.4,1610
DSW_AI7: S1.15 U19.5 U24.6 | length 1473.6
  Top Layer w16: S1.15@2955,1776.02 2955,1765.98 2984.23,1736.75 2984.23,1720.77 v1(2985,1720)
  Layer 1 w8: v1(2985,1720) 2985,1790 3100,1905 3400,1905 3555,2060 v1(3555,2415)
  Bottom Layer w8: U19.5@3462.44,2415 v1(3555,2415)
  Bottom Layer w16: v1(2985,1720) 3000,1705 3075,1705 3110,1670 U24.6@3110,1610
GND: C1.2 C2.2 C3.2 C4.2 C5.2 C6.2 C7.2 C8.2 C12.1 C14.1 C15.1 C16.1 C17.2 C19.2 C21.2 C23.2 C29.1 C31.2 C49.2 D1.2 D2.2 D3.2 D4.2 D5.2 D6.2 D7.2 D8.2 D9.2 D10.1 D11.1 D12.1 D13.1 D14.1 D15.1 D16.1 D17.1 D18.1 IC1.5 IC1.6 LED9.1 LED10.1 LED11.1 LED12.1 LED16.1 LED17.1 LED18.1 LED19.1 R3.1 R8.1 R11.1 R12.1 R15.1 R16.1 R23.1 R24.1 R60.2 R62.2 R63.1 R64.1 R65.1 R66.1 R67.1 R68.1 R69.1 R70.1 R74.2 R76.2 R80.2 R82.2 R86.2 R88.2 U1.4 U2.1 U4.5 U4.7 U5.1 U6.5 U6.7 U7.4 U8.1 U10.5 U10.7 U11.1 U12.5 U12.7 U13.4 U14.1 U16.5 U16.7 U17.1 U18.5 U18.7 U19.4 U20.1 U22.5 U22.7 U23.1 U24.5 U24.7 U29.9
GND0: C9.1 C10.1 C11.1 C13.1 C18.2 C20.2 C22.2 C24.2 C25.1 C26.1 C41.2 C48.2 IC1.15 IC2.15 J1.1 J1.22 J1.48 J1.61 J1.68 J1.71 LED1.1 LED2.1 LED3.1 LED4.1 LED5.1 LED6.1 LED7.1 LED8.1 P2.1 P3.7 P4.7 P4.8 P4.9 P4.10 R46.2 R49.2 R50.2 R51.2 R52.2 R53.2 R54.2 R55.2 R56.2 R59.2 R61.2 R73.2 R75.2 R79.2 R81.2 R85.2 R87.2 U3.4 U9.4 U15.4 U21.4 U25.8 U28.5 U29.8
  other v1: 4785,2860 4785,2910
GND_ISO_AO: C40.1 C42.1 C43.1 C44.1 C45.1 IC3.5 IC3.7 IC4.5 IC4.7 U25.9
GND_Power: C27.2 C28.1 D10.2 IC2.19 | length 144.6
  Top Layer w17: v1(3625,2635) 3625,2623.15 3697.32,2550.83 IC2.19@3697.32,2520.32